# Allegro board MT-2T4R-01_REV-A_20260407.brd
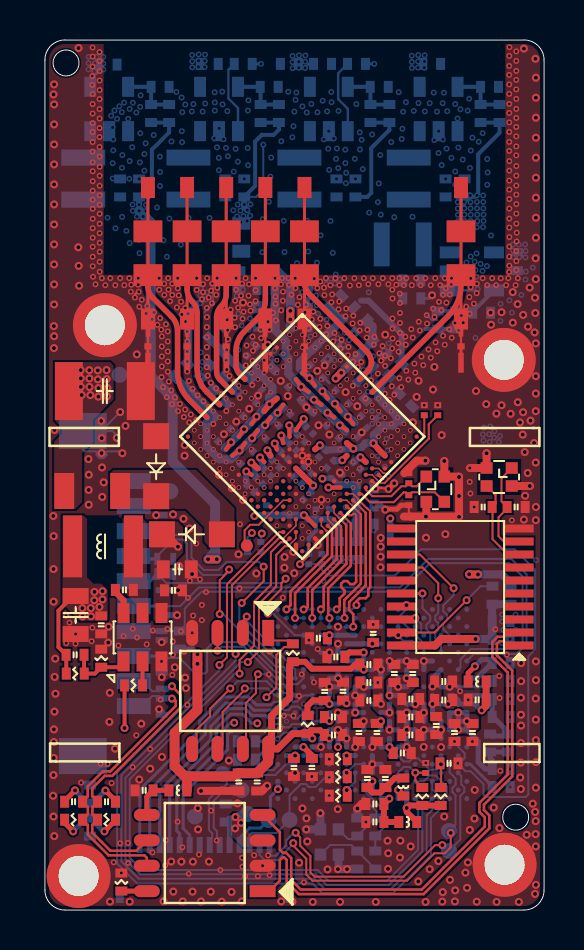
[diagram p0: board, top side]
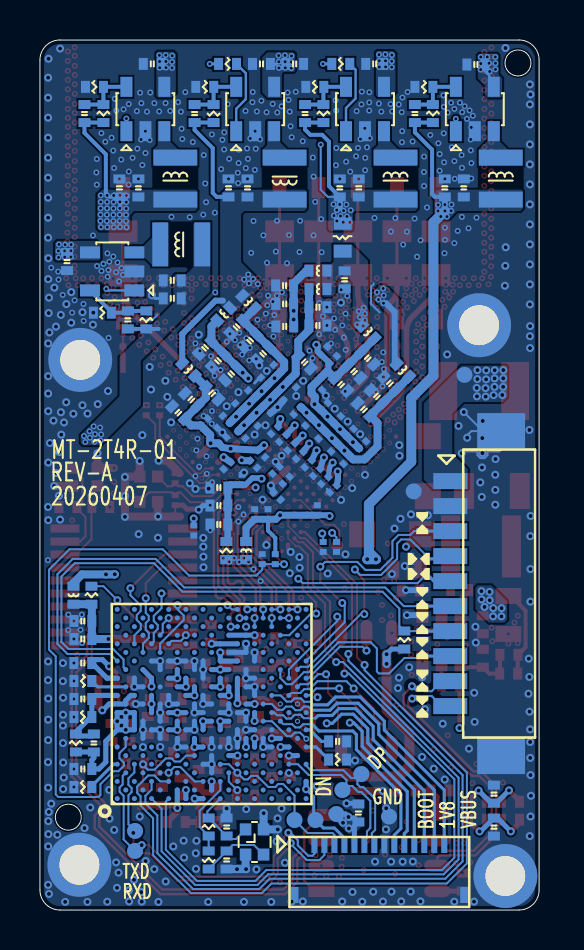
[diagram p1: board, bottom side, seen from below]

Outline 25 x 43.5 mm; copper layers: TOP, 02-GND1, 03-POWER, BOTTOM. Coordinates in mm from the lower left corner of the outline.
Outline path: circle c1.06,42.35 r0.65 ; circle c23.58,4.64 r0.65 ; 0,42.5 0,1 arc(0.29,0.29) 1,0 24,0 arc(24.71,0.29) 25,1 25,42.5 arc(24.71,43.21) 24,43.5 1,43.5 arc(0.29,43.21) 0,42.5

## Design rules (mm)
net group DP6: nets N2464554 N2465035
net group DP7: nets RXCAN TXCAN
net group DP8: nets CANH CANL
net group DP9: nets USB_DN USB_DP

## Placement (name value [footprint] x y rotation side)
C1  100pF  [0201]  13.12 27.08 225 bottom
C2  100pF  [0201]  14.39 25.81 225 bottom
C3  100pF  [0201]  13.76 26.45 225 bottom
C4  100pF  [0201]  15.05 25.16 225 bottom
C5  100pF  [0201]  15.67 24.54 225 bottom
C6  100pF  [0201]  12.34 26.3 45 bottom
C7  100pF  [0201]  12.98 25.67 45 bottom
C8  100pF  [0201]  13.62 25.03 45 bottom
C9  100pF  [0201]  14.27 24.38 45 bottom
C10  100pF  [0201]  14.89 23.76 45 bottom
C11  100pF  [0201]  11.53 24.4 135 bottom
C12  100pF  [0201]  12.12 24.96 135 bottom
C13  100pF  [0201]  9.62 22.49 135 bottom
C14  100pF  [0201]  10.88 23.74 135 bottom
C15  100pF  [0201]  10.24 23.1 135 bottom
C16  100pF  [0201]  11.04 25.83 315 bottom
C17  100pF  [0201]  10.75 25.19 315 bottom
C18  100pF  [0201]  10.1 24.52 315 bottom
C19  100pF  [0201]  9.46 23.88 315 bottom
C20  100pF  [0201]  8.84 23.26 315 bottom
C21  100pF  [0201]  10.31 27.52 315 bottom
C22  100pF  [0201]  10.79 27.99 315 bottom
C23  100pF  [0201]  11.14 21.89 135 bottom
C24  100pF  [0201]  11.99 22.73 135 bottom
C25  100pF  [0201]  12.84 23.58 135 bottom
C26  100pF  [0201]  10.31 21.05 135 bottom
C27  100pF  [0201]  17.3 18.98 90 bottom
C28  100pF  [0201]  15.62 22.21 135 bottom
C29  100pF  [0201]  11.57 22.31 135 bottom
C30  100pF  [0201]  12.41 23.16 135 bottom
C31  100pF  [0201]  14.3 22.29 45 bottom
C32  100pF  [0201]  13.24 23.99 135 bottom
C33  100pF  [0201]  10.73 21.48 135 bottom
C35  100pF  [0201]  15.84 23.47 315 bottom
C36  100pF  [0201]  13.9 22.81 45 bottom
C37  100pF  [0201]  16.77 24.4 315 bottom
C38  100pF  [0201]  16.3 23.93 315 bottom
C39  100pF  [0201]  14.87 21.51 270 bottom
C40  100pF  [0201]  13.17 21.99 315 bottom
C41  100pF  [0201]  12.67 21.49 315 bottom
C42  100pF  [0201]  13.12 20.69 45 bottom
C44  100pF  [0201]  14.24 19.79 270 bottom
C45  100pF  [0201]  11.11 19.99 270 bottom
C46  100pF  [0201]  13.58 19.79 270 bottom
C48  8pF  [0201]  18.23 21.59 270 top
C49  16pF  [0201]  18.23 20.49 90 top
C50  100pF  [0201]  19.67 24.99 270 top
C51  100nF  [0201]  13.87 17.54 270 bottom
C52  15pF  [C0402]  15.65 4.15 90 bottom
C53  15pF  [C0402]  15.65 2.5 270 bottom
C57  1uF  [C0402]  9.71 6.4 270 top
C66  10uF  [C0402]  11.08 30.14 0 bottom
C67  10nF  [C0402]  11.08 29.23 0 bottom
C68  100pF  [C0402]  11.75 27.39 45 bottom
C70  0.1uF  [C0402]  10.09 8.43 0 bottom
C72  10uF  [C0402]  8.58 27.59 45 bottom
C73  10nF  [C0402]  9.27 26.92 45 bottom
C74  100pF  [C0402]  9.92 26.27 45 bottom
C75  10uF  [C0402]  16.04 19.27 180 bottom
C76  10nF  [C0402]  16.04 20.22 180 bottom
C77  100pF  [C0402]  16.04 21.12 180 bottom
C81  10uF  [C0402]  12.74 29.18 180 bottom
C82  10nF  [C0402]  12.74 30.31 180 bottom
C83  100pF  [C0402]  12.75 31.22 180 bottom
C84  10uF  [C0402]  12.24 42.31 0 bottom
C85  0.1uF  [C0402]  13.9 42.31 180 bottom
C86  10pF  [C0402]  17.25 39.82 270 bottom
C87  10uF  [C0402]  14.6 36.11 90 bottom
C88  0.1uF  [C0402]  15.55 36.11 90 bottom
C90  10uF  [C0402]  15.15 29.15 135 bottom
C91  10nF  [C0402]  14.47 28.46 135 bottom
C92  100pF  [C0402]  13.82 27.81 135 bottom
C93  0.1uF  [C0402]  18.37 30.58 180 bottom
C94  10uF  [C0402]  18.37 31.48 180 bottom
C95  10uF  [C0402]  7.47 26.33 225 bottom
C96  10nF  [C0402]  8.12 25.68 225 bottom
C97  100pF  [C0402]  8.77 25.03 225 bottom
C98  10uF  [C0402]  16.37 25.83 45 bottom
C99  10nF  [C0402]  17.42 25.52 225 bottom
C100  100pF  [C0402]  18.07 24.87 225 bottom
C104  10uF  [C0402]  16.73 28.11 135 bottom
C105  10nF  [C0402]  16.08 27.46 135 bottom
C106  100pF  [C0402]  15.42 26.8 135 bottom
C116  0.1uF  [C0402]  9.74 31.51 270 bottom
C128  0.1uF  [C0402]  22.85 13.55 180 bottom
C129  10uF  [C0402]  22.85 14.45 180 bottom
C130  18pF  [C0402]  21.95 20.15 0 top
C131  18pF  [C0402]  23.6 20.15 180 top
C132  4.7nF  [C0402]  2.26 4.14 270 bottom
C133  47pF  [C0402]  1.44 5.41 0 top
C134  47pF  [C0402]  3.09 5.41 0 top
C135  47pF  [C0402]  2.26 5.79 90 bottom
C136  0.1uF  [C0402]  9.05 4.85 270 bottom
C137  0.1uF  [C0402]  4.97 5.98 0 top
C138  0.1uF  [C0402]  9.03 36.11 270 bottom
C139  0.1uF  [C0402]  4.72 36.11 270 bottom
C140  10pF  [C0402]  11.72 39.82 270 bottom
C141  10pF  [C0402]  6.22 39.82 270 bottom
C142  10uF  [C0402]  3.17 42.27 0 bottom
C143  10uF  [C0402]  3.77 36.11 270 bottom
C145  10uF  [C0402]  8.23 42.31 180 bottom
C146  10uF  [C0402]  9.98 36.11 270 bottom
C147  10uF  [C0402]  20.07 36.11 270 bottom
C148  10uF  [C0402]  19.37 42.31 0 bottom
C149  0.1uF  [C0402]  21.02 36.11 270 bottom
C150  10uF  [C0402]  23.65 32.42 270 bottom
C151  10pF  [C0402]  20.6 29.5 270 bottom
C153  10pF  [C0402]  22.77 39.82 270 bottom
C193  0.1uF  [C0402]  16.23 12.28 0 top
C194  1uF  [C0402]  21.65 10.51 180 top
C198  1uF  [C0402]  14.01 10.93 90 top
C200  0.1uF  [C0402]  22.85 12.35 0 bottom
C205  0.1uF  [C0402]  16.52 5.3 0 top
C206  10uF  [C0402]  16.23 10.47 0 top
C208  0.1uF  [C0402]  14.93 10.94 90 top
C209  10nF  [C0402]  16.23 11.38 0 top
C210  1uF  [C0402]  14.45 9.65 0 top
C214  10uF  [C0402]  19.6 9.22 270 top
C215  0.1uF  [C0402]  21.41 8.87 270 top
C216  10uF  [C0402]  18.32 10.55 0 top
C217  0.1uF  [C0402]  17.5 11.82 90 top
C220  0.1uF  [C0402]  16.15 6.58 270 top
C221  10nF  [C0402]  18.43 11.82 90 top
C223  1uF  [C0402]  22.85 7.05 0 bottom
C224  0.1uF  [C0402]  22.85 10.55 0 bottom
C225  0.1uF  [C0402]  22.3 8.35 90 bottom
C227  10nF  [C0402]  20.51 8.87 270 top
C229  0.1uF  [C0402]  17.9 7.85 0 top
C232  0.1uF  [C0402]  14.57 12.65 180 top
C234  0.1uF  [C0402]  13.37 7.12 270 top
C237  0.1uF  [C0402]  14.45 8.75 0 top
C244  0.1uF  [C0402]  12.47 7.12 270 top
C247  0.1uF  [C0402]  13.7 13.59 180 top
C249  0.1uF  [C0402]  16.44 13.83 270 top
C252  1uF  [C0402]  20.24 7.33 180 top
C253  100nF  [0201]  19.07 7.1 270 top
C254  0.1uF  [C0402]  10.63 6.4 270 top
C256  100pF  [C0402]  1.51 12.76 0 top
C257  22uF/10V  [C0805]  1.54 14.75 270 top
C258  10uF  [C0402]  2.82 14.26 270 top
C260  10uF/25V  [C0603]  6.63 17.03 0 top
C261  0.1uF  [C0402]  6.44 15.98 180 top
C263  0.1uF  [C0402]  3.98 16 180 top
C264  10uF  [C0402]  16.52 4.4 180 top
C265  10uF  [C0402]  17.05 6.58 90 top
C266  0.1uF  [C0402]  19.98 11.43 0 top
C267  10nF  [C0402]  19.98 10.5 0 top
C268  0.1uF  [C0402]  18.32 8.75 0 top
C269  10nF  [C0402]  18.32 9.65 0 top
C270  0.1uF  [C0402]  16.62 8.88 270 top
C271  10nF  [C0402]  15.72 8.88 270 top
C272  22uF/35V  [C1210]  3 25.95 180 top
D2  ESD  [SOD123_FL]  5.57 22.19 90 top
D3  S14  [SOD123_FL]  7.36 18.78 0 top
ESD15  -  [ESD0402]  5.85 10.17 270 bottom
ESD16  -  [ESD0402]  5.85 11.47 90 bottom
ESD17  -  [ESD0402]  5.85 13.09 90 bottom
ESD18  -  [ESD0402]  5.85 14.34 90 bottom
ESD19  -  [ESD0402]  5.85 15.59 90 bottom
ESD20  -  [ESD0402]  6.03 16.8 0 bottom
ESD21  -  [ESD0402]  6.03 17.56 0 bottom
ESD22  -  [ESD0402]  5.85 19.34 90 bottom
F1  SRF1206P100-24  [F1206]  2.37 20.95 0 top
FB1  BLM03AX100SZ1B  [L0402]  11.07 31.05 0 bottom
FB3  BLM03AX100SZ1B  [L0402]  8.55 28.9 225 bottom
FB5  BLM03AX100SZ1B  [L0402]  11.08 31.97 0 bottom
FB6  BLM03AX100SZ1B  [L0402]  14.67 17.97 90 bottom
FB7  BLM03AX100SZ1B  [L0402]  14.55 30.4 225 bottom
FB8  BLM03AX100SZ1B  [L0402]  6.82 26.98 225 bottom
FB9  BLM03AX100SZ1B  [L0402]  17.55 27.02 225 bottom
FB11  BLM03AX100SZ1B  [L0402]  15.8 29.8 315 bottom
FB12  BLM03AX100SZ1B  [L0402]  23.32 15.74 270 bottom
FB13  BLM03AX100SZ1B  [L0402]  6.66 5.98 180 top
FB16  BLM03AX100SZ1B  [L0402]  21.65 11.43 180 top
FB17  BLM03AX100SZ1B  [L0402]  18.18 4.4 0 top
FB18  BLM03AX100SZ1B  [L0402]  17.95 6.15 270 top
H1  M2  [MH3D2-2D0]  3 29.24 0 top
H2  M2  [MH3D2-2D0]  23.02 2.26 0 top
H3  M2  [MH3D2-2D0]  22.98 27.51 0 top
H4  M2  [MH3D2-2D0]  1.69 1.7 0 top
J2  MX1D25-10  [1D25T-10PLT]  4.45 15.82 270 bottom
J3  FPC-14_0D5  [HC-FPC-05-09-14RLTAG]  8 3.25 180 bottom
L2  FHD4020S-2R2MT  [L4020]  2.91 18.18 180 top
L5  FTC252012S2R2MBCA  [L2520]  12.74 36.57 270 bottom
L11  FTC252012S2R2MBCA  [L2520]  1.92 36.57 90 bottom
L12  FTC252012S2R2MBCA  [L2520]  7.19 36.57 90 bottom
L13  FTC252012S2R2MBCA  [L2520]  18.22 36.57 90 bottom
L14  FTC252012S2R2MBCA  [L2520]  17.92 33.28 0 bottom
R4  240/1%  [R0402]  22.85 11.45 0 bottom
R11  220K 1%  [R0402]  1.52 11.82 0 top
R12  30K 1%  [R0402]  2.82 12.59 90 top
R18  1M  [R0402]  16.55 4.15 270 bottom
R28  24K 1%  [0201]  19 24.99 270 top
R31  10K  [0201]  13.21 17.54 270 bottom
R40  133 1%  [R0402]  10.09 7.52 180 bottom
R48  5.1R  [R0402]  15.67 17.97 90 bottom
R50  100K  [R0402]  15.6 42.31 0 bottom
R51  47K 1%  [R0402]  16.3 39.82 90 bottom
R53  100K/1%  [R0402]  5.32 39.82 270 bottom
R54  33K 1%  [R0402]  16.74 41.16 0 bottom
R56  20K  [0201]  10.15 18.15 90 bottom
R57  20K  [0201]  10.81 18.15 90 bottom
R61  30K/1%  [R0402]  21.82 39.82 270 bottom
R63  49.9K/1%  [R0402]  22.27 41.16 180 bottom
R64  68K/1%  [R0402]  19.67 29.5 270 bottom
R67  68K/1%  [R0402]  21.87 29.87 180 bottom
R70  10K  [R0402]  22.42 15.74 270 bottom
R71  62R  [R0402]  1.44 4.51 0 top
R72  62R  [R0402]  3.09 4.51 0 top
R73  10K  [R0402]  3.83 1.4 90 top
R74  33K/1%  [R0402]  11.23 41.16 180 bottom
R75  68K/1%  [R0402]  10.8 39.82 270 bottom
R76  100K  [R0402]  9.93 42.31 180 bottom
R77  22K/1%  [R0402]  5.77 41.16 0 bottom
R83  0R  [R0603]  9.84 33.64 270 bottom
R86  10K/1%  [R0402]  22.85 9.65 180 bottom
R87  10K/1%  [R0402]  23.2 8.35 270 bottom
R89  1K  [R0402]  22.85 6.15 180 bottom
R90  1.8K  [R0402]  16.55 2.5 90 bottom
R93  100K  [R0402]  19.82 5.67 270 top
R94  100K  [R0402]  18.9 5.67 270 top
R97  100K  [R0402]  6.75 13.5 270 bottom
R98  10K  [R0402]  14.69 7.54 0 top
R99  10K  [R0402]  14.69 6.64 0 top
R100  10K  [R0402]  14.69 5.71 0 top
R101  0  [R0402]  13.16 9.27 270 top
R102  100K  [R0402]  4.44 11.23 0 top
R103  10K  [R0402]  12.42 12.86 90 top
RX1  ANTENNA  [MOTO_1X4_RF]  11.04 31.76 0 top
RX2  ANTENNA  [MOTO_1X4_RF]  9.08 31.76 0 top
RX3  ANTENNA  [MOTO_1X4_RF]  7.12 31.76 0 top
RX4  ANTENNA  [MOTO_1X4_RF]  5.16 31.76 0 top
TP14  NC  [TP_80]  3.74 26.76 270 bottom
TP28  T  [TP_60]  10.12 18.22 45 top
TP31  NC  [TP_80]  6.28 20.93 0 bottom
TP36  NC  [TP_80]  12.25 4.5 180 bottom
TP37  NC  [TP_80]  20.24 2.95 180 bottom
TP38  NC  [TP_80]  20.24 3.95 180 bottom
TP39  NC  [TP_80]  10.15 4.8 180 bottom
TP40  NC  [TP_80]  9.85 6 225 bottom
TP41  NC  [TP_80]  8.9 6.8 135 bottom
TP42  NC  [TP_80]  7.51 4.67 180 bottom
TP43  NC  [TP_80]  11.2 4.5 180 bottom
TX2  ANTENNA  [MOTO_1X4_RF]  13 31.76 0 top
TX3  ANTENNA  [MOTO_1X4_RF]  20.84 31.76 0 top
U1  Cheetah_4T4R  [CHEETAH_WLCSP265]  12.89 23.67 315 top
U4  SY8105IADC  [SOT23-6]  4.89 13.63 90 top
U8  YX55015F  [SOT23-5L]  3.22 40.04 90 bottom
U10  YX55015F  [SOT23-5L]  14.22 40.04 90 bottom
U11  YX55015F  [SOT23-5L]  21.37 31.93 0 bottom
U12  SIT1042AT/3  [SOP-8]  8 2.85 90 top
U14  MCP2515  [TSSOP20]  20.8 16.15 180 top
U15  YX55015F  [SOT23-5L]  8.72 40.04 90 bottom
U16  YX55015F  [SOT23-5L]  19.72 40.04 90 bottom
U19  XT25F16FSOIGU-S  [SOP-8]  9.28 10.95 180 top
U21  X2100L  [X2100_BGA264_0D43_10X10]  16.4 10.3 90 bottom
Y1  40MHz  [CRY4_2016]  19.55 21.04 270 top
Y2  16M  [CRY4_2016]  22.75 21.65 180 top
Y4  24M_20PPM  [CRY4_2016]  14.25 3.4 270 bottom

## Library data of the parts
C1-C33 C35-C42 C44-C46 C48-C51 C66-C68 C72-C77 C81-C86 C90-C92 C95-C100 C104-C106 C210 C223 C256 C257 = CAP NP
C52 C53 = CAP_NP_MINI
C57 C70 C87 C88 C116 C193 C194 C198 C200 C205 C206 C208 C209 C214-C217 C220 C221 C224 C225 C227 C229 C232 C234 C237 C244 C247 C249 C254 C258 C260 C264-C271 = CAP_NP
C93 C94 C128 C129 C133 C134 C136-C140 C142 C143 C145-C150 C261 C263 C272 = CAP_NP_3
C130-C132 C135 = CAP_NP_2
C141 C151 C153 C252 C253 = CAP NP_2
D2 = Diode H Zener_0
D3 = DIODE PIN_5
ESD15-ESD22 = 1_0.5KE100A
F1 = FUSE
FB1 FB3 FB5-FB9 FB11-FB13 FB16-FB18 = FB
H1-H4 = HOLE-V8_3
J2 = CON12_0
J3 = CON16_0
L2 L11-L14 = INDUCTOR
L5 = Inductor 1206 H_0
R4 R40 = R_10
R11 R12 = R_0
R18 R103 = R_MINI_7
R28 R48 R50 R56 R57 = RES_0
R31 R51 R54 R83 = R
R53 R61 R63 R64 R67 R70-R77 R86 R87 R93 R94 R97 R101 R102 = R_MINI
R89 = R_1
R90 R98-R100 = R_52
RX1-RX4 TX2 TX3 = ANTENNA_2
TP14 TP31 TP36-TP43 = TEST_0
TP28 = TEST_2
U1 = Cheetah_4T4R
U4 = SOT-26_2
U8 U10 U11 U15 U16 = DCDC_RT8096C_6
U12 = IC-8_1
U14 = SIT2515_1
U19 = XM25QH128A_0
U21 = X2100L
Y1 Y2 Y4 = CRYSTAL_4

## Footprints (pads in the part's own frame, mm; a bottom-side part is the same pattern mirrored in y, then rotated)
1D25T-10PLT
  rect 0.8x1.7 smd: 1(-5.625,0) 2(-4.375,0) 3(-3.125,0) 4(-1.875,0) 5(-0.625,0) 6(0.625,0) 7(1.875,0) 8(3.125,0) 9(4.375,0) 10(5.625,0)
  rect 1.8x2.4 smd: 11(-8.125,2.55) 12(8.125,2.55)
0201
  rect 0.3x0.35 smd: 1(-0.25,0) 2(0.25,0)
C0402
  rect 0.45x0.599 smd: 1(-0.45,0) 2(0.45,0)
C0603
  rect 0.65x0.899 smd: 1(-0.7,0) 2(0.7,0)
C0805
  rect 0.8x1.3 smd: 1(-0.95,0) 2(0.95,0)
C1210
  rect 1.4x2.9 smd: 1(-1.8,0) 2(1.8,0)
CHEETAH_WLCSP265
  round 0.221 smd: A1(-4.05,4.05) A2(-3.6,4.05) A3(-3.15,4.05) A4(-2.7,4.05) A5(-2.25,4.05) A6(-1.8,4.05) A7(-1.35,4.05) A8(-0.9,4.05) A9(-0.45,4.05) A10(0,4.05) A11(0.45,4.05) A12(0.9,4.05) A13(1.35,4.05) A14(1.8,4.05) A15(2.25,4.05) A16(2.7,4.05) A17(3.15,4.05) A18(3.6,4.05) A19(4.05,4.05) B1(-4.05,3.6) B2(-3.6,3.6) B3(-3.15,3.6) B4(-2.7,3.6) B5(-2.25,3.6) B7(-1.35,3.6) B9(-0.45,3.6) B11(0.45,3.6) B13(1.35,3.6) B14(1.8,3.6) B15(2.25,3.6) B16(2.7,3.6) B17(3.15,3.6) B18(3.6,3.6) B19(4.05,3.6) C1(-4.05,3.15) C2(-3.6,3.15) C3(-3.15,3.15) C5(-2.25,3.15) C7(-1.35,3.15) C9(-0.45,3.15) C11(0.45,3.15) C13(1.35,3.15) C14(1.8,3.15) C15(2.25,3.15) C16(2.7,3.15) C17(3.15,3.15) C18(3.6,3.15) C19(4.05,3.15) D1(-4.05,2.7) D2(-3.6,2.7) D3(-3.15,2.7) D5(-2.25,2.7) D7(-1.35,2.7) D9(-0.45,2.7) D11(0.45,2.7) D13(1.35,2.7) D16(2.7,2.7) D17(3.15,2.7) D18(3.6,2.7) D19(4.05,2.7) E1(-4.05,2.25) E2(-3.6,2.25) E3(-3.15,2.25) E5(-2.25,2.25) E7(-1.35,2.25) E9(-0.45,2.25) E11(0.45,2.25) E13(1.35,2.25) E17(3.15,2.25) E18(3.6,2.25) E19(4.05,2.25) F1(-4.05,1.8) F2(-3.6,1.8) F3(-3.15,1.8) F5(-2.25,1.8) F7(-1.35,1.8) F9(-0.45,1.8) F11(0.45,1.8) F13(1.35,1.8) F14(1.8,1.8) F17(3.15,1.8) F18(3.6,1.8) F19(4.05,1.8) G1(-4.05,1.35) G2(-3.6,1.35) G3(-3.15,1.35) G5(-2.25,1.35) G7(-1.35,1.35) G9(-0.45,1.35) G11(0.45,1.35) G13(1.35,1.35) G14(1.8,1.35) G17(3.15,1.35) G18(3.6,1.35) G19(4.05,1.35) H1(-4.05,0.9) H2(-3.6,0.9) H3(-3.15,0.9) H13(1.35,0.9) H14(1.8,0.9) H15(2.25,0.9) H16(2.7,0.9) H17(3.15,0.9) H18(3.6,0.9) H19(4.05,0.9) J1(-4.05,0.45) J2(-3.6,0.45) J3(-3.15,0.45) J4(-2.7,0.45) J5(-2.25,0.45) J6(-1.8,0.45) J7(-1.35,0.45) J16(2.7,0.45) J17(3.15,0.45) J18(3.6,0.45) J19(4.05,0.45) K1(-4.05,0) K9(-0.45,0) K10(0,0) K11(0.45,0) K12(0.9,0) K16(2.7,0) K17(3.15,0) K18(3.6,0) K19(4.05,0) L1(-4.05,-0.45) L2(-3.6,-0.45) L3(-3.15,-0.45) L4(-2.7,-0.45) L5(-2.25,-0.45) L6(-1.8,-0.45) L7(-1.35,-0.45) L9(-0.45,-0.45) L10(0,-0.45) L11(0.45,-0.45) L12(0.9,-0.45) L13(1.35,-0.45) L14(1.8,-0.45) L16(2.7,-0.45) L17(3.15,-0.45) L18(3.6,-0.45) L19(4.05,-0.45) M1(-4.05,-0.9) M9(-0.45,-0.9) M10(0,-0.9) M11(0.45,-0.9) M12(0.9,-0.9) M13(1.35,-0.9) M14(1.8,-0.9) M17(3.15,-0.9) M18(3.6,-0.9) M19(4.05,-0.9) N1(-4.05,-1.35) N2(-3.6,-1.35) N3(-3.15,-1.35) N4(-2.7,-1.35) N5(-2.25,-1.35) N6(-1.8,-1.35) N7(-1.35,-1.35) N9(-0.45,-1.35) N10(0,-1.35) N11(0.45,-1.35) N12(0.9,-1.35) N13(1.35,-1.35) N14(1.8,-1.35) N17(3.15,-1.35) N18(3.6,-1.35) N19(4.05,-1.35) P1(-4.05,-1.8) P9(-0.45,-1.8) P10(0,-1.8) P11(0.45,-1.8) P12(0.9,-1.8) P13(1.35,-1.8) P14(1.8,-1.8) P15(2.25,-1.8) P16(2.7,-1.8) P17(3.15,-1.8) P18(3.6,-1.8) P19(4.05,-1.8) R1(-4.05,-2.25) R2(-3.6,-2.25) R3(-3.15,-2.25) R4(-2.7,-2.25) R5(-2.25,-2.25) R6(-1.8,-2.25) R7(-1.35,-2.25) R9(-0.45,-2.25) R10(0,-2.25) R11(0.45,-2.25) R12(0.9,-2.25) R13(1.35,-2.25) R14(1.8,-2.25) R15(2.25,-2.25) R16(2.7,-2.25) R17(3.15,-2.25) R18(3.6,-2.25) R19(4.05,-2.25) T1(-4.05,-2.7) T9(-0.45,-2.7) T10(0,-2.7) T11(0.45,-2.7) T12(0.9,-2.7) T13(1.35,-2.7) T14(1.8,-2.7) T15(2.25,-2.7) T17(3.15,-2.7) T18(3.6,-2.7) T19(4.05,-2.7) U1(-4.05,-3.15) U2(-3.6,-3.15) U3(-3.15,-3.15) U4(-2.7,-3.15) U5(-2.25,-3.15) U6(-1.8,-3.15) U7(-1.35,-3.15) U9(-0.45,-3.15) U10(0,-3.15) U11(0.45,-3.15) U12(0.9,-3.15) U13(1.35,-3.15) U14(1.8,-3.15) U15(2.25,-3.15) U16(2.7,-3.15) U17(3.15,-3.15) U18(3.6,-3.15) U19(4.05,-3.15) V1(-4.05,-3.6) V2(-3.6,-3.6) V3(-3.15,-3.6) V4(-2.7,-3.6) V5(-2.25,-3.6) V6(-1.8,-3.6) V7(-1.35,-3.6) V8(-0.9,-3.6) V9(-0.45,-3.6) V10(0,-3.6) V11(0.45,-3.6) V12(0.9,-3.6) V13(1.35,-3.6) V14(1.8,-3.6) V15(2.25,-3.6) V16(2.7,-3.6) V17(3.15,-3.6) V18(3.6,-3.6) V19(4.05,-3.6) W1(-4.05,-4.05) W2(-3.6,-4.05) W3(-3.15,-4.05) W4(-2.7,-4.05) W5(-2.25,-4.05) W6(-1.8,-4.05) W7(-1.35,-4.05) W8(-0.9,-4.05) W9(-0.45,-4.05) W10(0,-4.05) W11(0.45,-4.05) W12(0.9,-4.05) W13(1.35,-4.05) W14(1.8,-4.05) W15(2.25,-4.05) W16(2.7,-4.05) W17(3.15,-4.05) W18(3.6,-4.05) W19(4.05,-4.05)
CRY4_2016
  rect 0.6x0.58 smd: 1(-0.63,-0.45) 2(0.63,-0.45) 3(0.63,0.45) 4(-0.63,0.45)
ESD0402
  rect 0.3x0.599 smd: 1(-0.399,0) 2(0.399,0)
F1206
  rect 1x1.8 smd: 1(-1.4,0) 2(1.4,0)
HC-FPC-05-09-14RLTAG
  rect 0.3x0.8 smd: 1(-3.25,0) 2(-2.75,0) 3(-2.25,0) 4(-1.75,0) 5(-1.25,0) 6(-0.75,0) 7(-0.25,0) 8(0.25,0) 9(0.75,0) 10(1.25,0) 11(1.75,0) 12(2.25,0) 13(2.75,0) 14(3.25,0)
  rect 0.4x0.8 smd: 15(-4.25,-2.5) 16(4.25,-2.5)
L0402
  rect 0.45x0.599 smd: 1(-0.45,0) 2(0.45,0)
L2520
  rect 0.8x2.2 smd: 1(-1.05,0) 2(1.05,0)
L4020
  rect 0.95x3.1 smd: 1(-1.525,0) 2(1.525,0)
MH3D2-2D0
  round 3.2 hole 2: 1(0,0)
MOTO_1X4_RF
  custom 1.442x9.787 smd: 1(0,0)
R0402
  rect 0.45x0.599 smd: 1(-0.45,0) 2(0.45,0)
R0603
  rect 0.65x0.899 smd: 1(-0.7,0) 2(0.7,0)
SOD123_FL
  rect 1.3x1.3 smd: 1(-1.5,0) 2(1.5,0)
SOP-8
  rect 0.6x1.3 smd: 1(-1.905,-2.9)
  oval 0.6x1.3 smd: 2(-0.635,-2.9) 3(0.635,-2.9) 4(1.905,-2.9) 5(1.905,2.9) 6(0.635,2.9) 7(-0.635,2.9) 8(-1.905,2.9)
SOT23-5L
  rect 1x0.6 smd: 1(-1.1,0.95) 2(-1.1,0) 3(-1.1,-0.95) 4(1.12,-0.95) 5(1.12,0.95)
SOT23-6
  rect 1x0.6 smd: 1(-1.2,0.95) 2(-1.2,0) 3(-1.2,-0.95) 4(1.22,-0.95) 5(1.22,0) 6(1.22,0.95)
TP_60
  round 0.6 smd: 1(0,0)
TP_80
  round 0.8 smd: 1(0,0)
TSSOP20
  rect 1.45x0.4 smd: 1(-2.95,2.925) 2(-2.95,2.275) 3(-2.95,1.625) 4(-2.95,0.975) 5(-2.95,0.325) 6(-2.95,-0.325) 7(-2.95,-0.975) 8(-2.95,-1.625) 9(-2.95,-2.275) 10(-2.95,-2.925) 11(2.95,-2.925) 12(2.95,-2.275) 13(2.95,-1.625) 14(2.95,-0.975) 15(2.95,-0.325) 16(2.95,0.325) 17(2.95,0.975) 18(2.95,1.625) 19(2.95,2.275) 20(2.95,2.925)
X2100_BGA264_0D43_10X10
  round 0.25 smd: A1(-4.73,4.73) A3(-3.87,4.73) A5(-3.01,4.73) A7(-2.15,4.73) A9(-1.29,4.73) A11(-0.43,4.73) A13(0.43,4.73) A15(1.29,4.73) A17(2.15,4.73) A19(3.01,4.73) A21(3.87,4.73) A23(4.73,4.73) AA1(-4.73,-3.87) AA3(-3.87,-3.87) AA5(-3.01,-3.87) AA7(-2.15,-3.87) AA9(-1.29,-3.87) AA11(-0.43,-3.87) AA13(0.43,-3.87) AA15(1.29,-3.87) AA17(2.15,-3.87) AA19(3.01,-3.87) AA21(3.87,-3.87) AA23(4.73,-3.87) AB2(-4.3,-4.3) AB4(-3.44,-4.3) AB6(-2.58,-4.3) AB8(-1.72,-4.3) AB10(-0.86,-4.3) AB12(0,-4.3) AB14(0.86,-4.3) AB16(1.72,-4.3) AB18(2.58,-4.3) AB20(3.44,-4.3) AB22(4.3,-4.3) AC1(-4.73,-4.73) AC3(-3.87,-4.73) AC5(-3.01,-4.73) AC7(-2.15,-4.73) AC9(-1.29,-4.73) AC11(-0.43,-4.73) AC13(0.43,-4.73) AC15(1.29,-4.73) AC17(2.15,-4.73) AC19(3.01,-4.73) AC21(3.87,-4.73) AC23(4.73,-4.73) B2(-4.3,4.3) B4(-3.44,4.3) B6(-2.58,4.3) B8(-1.72,4.3) B10(-0.86,4.3) B12(0,4.3) B14(0.86,4.3) B16(1.72,4.3) B18(2.58,4.3) B20(3.44,4.3) B22(4.3,4.3) C1(-4.73,3.87) C3(-3.87,3.87) C5(-3.01,3.87) C7(-2.15,3.87) C9(-1.29,3.87) C11(-0.43,3.87) C13(0.43,3.87) C15(1.29,3.87) C17(2.15,3.87) C19(3.01,3.87) C21(3.87,3.87) C23(4.73,3.87) D2(-4.3,3.44) D4(-3.44,3.44) D6(-2.58,3.44) D8(-1.72,3.44) D10(-0.86,3.44) D12(0,3.44) D14(0.86,3.44) D16(1.72,3.44) D18(2.58,3.44) D20(3.44,3.44) D22(4.3,3.44) E1(-4.73,3.01) E3(-3.87,3.01) E5(-3.01,3.01) E7(-2.15,3.01) E9(-1.29,3.01) E11(-0.43,3.01) E13(0.43,3.01) E15(1.29,3.01) E17(2.15,3.01) E19(3.01,3.01) E21(3.87,3.01) E23(4.73,3.01) F2(-4.3,2.58) F4(-3.44,2.58) F6(-2.58,2.58) F8(-1.72,2.58) F10(-0.86,2.58) F12(0,2.58) F14(0.86,2.58) F16(1.72,2.58) F18(2.58,2.58) F20(3.44,2.58) F22(4.3,2.58) G1(-4.73,2.15) G3(-3.87,2.15) G5(-3.01,2.15) G9(-1.29,2.15) G11(-0.43,2.15) G13(0.43,2.15) G15(1.29,2.15) G17(2.15,2.15) G19(3.01,2.15) G21(3.87,2.15) G23(4.73,2.15) H2(-4.3,1.72) H4(-3.44,1.72) H6(-2.58,1.72) H8(-1.72,1.72) H10(-0.86,1.72) H12(0,1.72) H14(0.86,1.72) H16(1.72,1.72) H18(2.58,1.72) H20(3.44,1.72) H22(4.3,1.72) J1(-4.73,1.29) J3(-3.87,1.29) J5(-3.01,1.29) J7(-2.15,1.29) J9(-1.29,1.29) J11(-0.43,1.29) J13(0.43,1.29) J15(1.29,1.29) J17(2.15,1.29) J19(3.01,1.29) J21(3.87,1.29) J23(4.73,1.29) K2(-4.3,0.86) K4(-3.44,0.86) K6(-2.58,0.86) K8(-1.72,0.86) K10(-0.86,0.86) K12(0,0.86) K14(0.86,0.86) K16(1.72,0.86) K18(2.58,0.86) K20(3.44,0.86) K22(4.3,0.86) L1(-4.73,0.43) L3(-3.87,0.43) L5(-3.01,0.43) L7(-2.15,0.43) L9(-1.29,0.43) L11(-0.43,0.43) L13(0.43,0.43) L15(1.29,0.43) L17(2.15,0.43) L19(3.01,0.43) L21(3.87,0.43) L23(4.73,0.43) M2(-4.3,0) M4(-3.44,0) M6(-2.58,0) M8(-1.72,0) M10(-0.86,0) M12(0,0) M14(0.86,0) M16(1.72,0) M18(2.58,0) M20(3.44,0) M22(4.3,0) N1(-4.73,-0.43) N3(-3.87,-0.43) N5(-3.01,-0.43) N7(-2.15,-0.43) N9(-1.29,-0.43) N11(-0.43,-0.43) N13(0.43,-0.43) N15(1.29,-0.43) N17(2.15,-0.43) N19(3.01,-0.43) N21(3.87,-0.43) N23(4.73,-0.43) P2(-4.3,-0.86) P4(-3.44,-0.86) P6(-2.58,-0.86) P8(-1.72,-0.86) P10(-0.86,-0.86) P12(0,-0.86) P14(0.86,-0.86) P16(1.72,-0.86) P18(2.58,-0.86) P20(3.44,-0.86) P22(4.3,-0.86) R1(-4.73,-1.29) R3(-3.87,-1.29) R5(-3.01,-1.29) R7(-2.15,-1.29) R9(-1.29,-1.29) R11(-0.43,-1.29) R13(0.43,-1.29) R15(1.29,-1.29) R17(2.15,-1.29) R19(3.01,-1.29) R21(3.87,-1.29) R23(4.73,-1.29) T2(-4.3,-1.72) T4(-3.44,-1.72) T6(-2.58,-1.72) T8(-1.72,-1.72) T10(-0.86,-1.72) T12(0,-1.72) T14(0.86,-1.72) T16(1.72,-1.72) T18(2.58,-1.72) T20(3.44,-1.72) T22(4.3,-1.72) U1(-4.73,-2.15) U3(-3.87,-2.15) U5(-3.01,-2.15) U7(-2.15,-2.15) U9(-1.29,-2.15) U11(-0.43,-2.15) U13(0.43,-2.15) U15(1.29,-2.15) U17(2.15,-2.15) U19(3.01,-2.15) U21(3.87,-2.15) U23(4.73,-2.15) V2(-4.3,-2.58) V4(-3.44,-2.58) V6(-2.58,-2.58) V8(-1.72,-2.58) V10(-0.86,-2.58) V12(0,-2.58) V14(0.86,-2.58) V16(1.72,-2.58) V18(2.58,-2.58) V20(3.44,-2.58) V22(4.3,-2.58) W1(-4.73,-3.01) W3(-3.87,-3.01) W5(-3.01,-3.01) W7(-2.15,-3.01) W9(-1.29,-3.01) W11(-0.43,-3.01) W13(0.43,-3.01) W15(1.29,-3.01) W17(2.15,-3.01) W19(3.01,-3.01) W21(3.87,-3.01) W23(4.73,-3.01) Y2(-4.3,-3.44) Y4(-3.44,-3.44) Y6(-2.58,-3.44) Y8(-1.72,-3.44) Y10(-0.86,-3.44) Y12(0,-3.44) Y14(0.86,-3.44) Y16(1.72,-3.44) Y18(2.58,-3.44) Y20(3.44,-3.44) Y22(4.3,-3.44)

## Nets
AVDD14_RX: C11.2 C12.2 C13.2 C14.2 C15.2 C95.2 C96.2 C97.2 FB8.2 U1.J6(AVDD14_B) U1.L6(AVDD14_RX1) U1.N6(AVDD14_RX2) U1.R6(AVDD14_RX3) U1.U6(AVDD14_RX4)
AVDD14_SX: C35.2 C36.2 C37.2 C38.2 C98.2 C99.2 C100.2 FB9.2 U1.E17(AVDD14_SX1) U1.E18(AVDD14_SX2) U1.G14(AVDD14_SX3) U1.K12(AVDD14_LO)
AVDD14_TX: C1.2 C2.2 C3.2 C4.2 C5.2 C90.2 C91.2 C92.2 FB7.2 U1.E5(AVDD14_TX1) U1.E7(AVDD14_TX2) U1.E9(AVDD14_TX3) U1.E11(AVDD14_TX4) U1.E13(AVDD14_TX5)
AVDD18_RX: C16.2 C17.2 C18.2 C19.2 C20.2 C21.2 C22.2 C72.2 C73.2 C74.2 FB3.2 U1.E2(AVDD18_B1) U1.F2(AVDD18_B2) U1.J5(AVDD18_RX1) U1.L5(AVDD18_RX2) U1.N5(AVDD18_RX3) U1.R5(AVDD18_RX4) U1.U5(AVDD18_RX5)
AVDD18_TX: C6.2 C7.2 C8.2 C9.2 C10.2 C66.2 C67.2 C68.2 FB1.2 U1.F5(AVDD18_TX1) U1.F7(AVDD18_TX2) U1.F9(AVDD18_TX3) U1.F11(AVDD18_TX4) U1.F13(AVDD18_TX5)
AVDD18_XO: C39.2 C75.2 C76.2 C77.2 R48.2 U1.K17(AVDD18_XO)
DVDD14: C23.2 C24.2 C25.2 C26.2 C27.2 C40.2 C41.2 C42.2 C104.2 C105.2 C106.2 FB11.2 U1.K18(AVDD14_BBPLL) U1.L9(AVDD14_AD1) U1.N9(AVDD14_AD2) U1.N12(DVDD14_1) U1.N13(DVDD14_2) U1.N14(DVDD14_3) U1.R9(AVDD14_AD3) U1.U9(AVDD14_AD4)
DVDD18: C28.2 C29.2 C30.2 C31.2 C32.2 C33.2 C81.2 C82.2 C83.2 FB5.2 U1.G17(AVDD18_GPADC) U1.H15(AVDD18_BG) U1.K9(AVDD18_AD1) U1.L17(DVDD18) U1.M9(AVDD18_AD2) U1.P9(AVDD18_AD3) U1.P13(AVDD18_TOP) U1.T9(AVDD18_AD4)
DVDD_GPIO: C44.2 C45.2 C46.2 FB6.2 R31.1 U1.T17(DVDD_GPIO1) U1.T18(DVDD_GPIO2) U1.U11(DVDD_GPIO3)
GND: C1.1 C2.1 C3.1 C4.1 C5.1 C6.1 C7.1 C8.1 C9.1 C10.1 C11.1 C12.1 C13.1 C14.1 C15.1 C16.1 C17.1 C18.1 C19.1 C20.1 C21.1 C22.1 C23.1 C24.1 C25.1 C26.1 C27.1 C28.1 C29.1 C30.1 C31.1 C32.1 C33.1 C35.1 C36.1 C37.1 C38.1 C39.1 C40.1 C41.1 C42.1 C44.1 C45.1 C46.1 C48.1 C49.1 C50.1 C51.1 C52.2 C53.2 C57.2 C66.1 C67.1 C68.1 C70.1 C72.1 C73.1 C74.1 C75.1 C76.1 C77.1 C81.1 C82.1 C83.1 C84.1 C85.1 C87.2 C88.2 C90.1 C91.1 C92.1 C93.1 C94.1 C95.1 C96.1 C97.1 C98.1 C99.1 C100.1 C104.1 C105.1 C106.1 C116.2 C128.1 C129.1 C130.1 C131.1 C132.2 C135.2 C136.1 C137.1 C138.1 C139.1 C142.2 C143.1 C145.1 C146.1 C147.1 C148.2 C149.1 C150.2 C193.2 C194.2 C198.2 C200.2 C205.1 C206.2 C208.2 C209.2 C210.2 C214.2 C215.2 C216.2 C217.2 C220.1 C221.2 C223.2 C224.2 C227.2 C229.2 C232.2 C234.2 C237.2 C244.2 C247.2 C249.1 C252.1 C253.1 C254.2 C257.2 C258.2 C260.2 C261.1 C264.2 C265.2 C266.2 C267.2 C268.2 C269.2 C270.2 C271.2 C272.1 D2.2 ESD15.2(CATHODE) ESD16.2(CATHODE) ESD17.2(CATHODE) ESD18.2(CATHODE) ESD19.2(CATHODE) ESD20.2(CATHODE) ESD21.2(CATHODE) ESD22.2(CATHODE) H1.1 H2.1 H3.1 H4.1 J2.2 J2.11 J2.12 J3.8 J3.15 J3.16 R4.2 R12.2 R28.1 R40.2 R54.2 R56.1 R57.1 R63.1 R67.1 R73.2 R74.1 R77.2 R86.1 R89.1 R98.1 R99.1 R100.1 TP31.1(A) TP42.1(A) U1.A2(G_AVSS_RF1) U1.A3(G_AVSS_RF2) U1.A4(G_AVSS_RF3) U1.A5(G_AVSS_RF4) U1.A6(TX4) U1.A7(G_AVSS_RF5) U1.A8(TX3) U1.A9(G_AVSS_RF6) U1.A11(G_AVSS_RF7) U1.A13(G_AVSS_RF8) U1.A14(G_AVSS_RF9) U1.A15(G_AVSS_RF10) U1.A16(LO_SYNCI) U1.A17(G_AVSS_RF11) U1.A18(G_AVSS_RF12) U1.B1(G_AVSS_RF13) U1.B2(G_AVSS_RF14) U1.B3(G_AVSS_RF15) U1.B4(G_AVSS_RF16) U1.B5(G_AVSS_RF17) U1.B7(G_AVSS_RF18) U1.B9(G_AVSS_RF19) U1.B11(G_AVSS_RF20) U1.B13(G_AVSS_RF21) U1.B14(G_AVSS_RF22) U1.B15(G_AVSS_RF23) U1.B16(G_AVSS_RF24) U1.B17(G_AVSS_RF25) U1.B18(G_AVSS_RF26) U1.B19(G_AVSS_RF27) U1.C1(G_AVSS_RF28) U1.C2(LO_SYNCO2) U1.C3(G_AVSS_RF29) U1.C5(G_AVSS_RF30) U1.C7(G_AVSS_RF31) U1.C9(G_AVSS_RF32) U1.C11(G_AVSS_RF33) U1.C13(G_AVSS_RF34) U1.C14(G_AVSS_RF35) U1.C15(G_AVSS_RF36) U1.C16(G_AVSS_RF37) U1.C17(G_AVSS_RF38) U1.C18(G_AVSS_RF39) U1.C19(LO_SYNCO) U1.D1(G_AVSS_RF40) U1.D2(G_AVSS_RF41) U1.D3(G_AVSS_RF42) U1.D5(G_AVSS_RF43) U1.D7(G_AVSS_RF44) U1.D9(G_AVSS_RF45) U1.D11(G_AVSS_RF46) U1.D13(G_AVSS_RF47) U1.D16(G_AVSS_RF48) U1.D17(G_AVSS_RF49) U1.D18(G_AVSS_RF50) U1.D19(G_AVSS_RF51) U1.E1(G_AVSS_RF52) U1.E3(G_AVSS_RF53) U1.E19(ACT_SX) U1.F1(G_AVSS_RF54) U1.F3(G_AVSS_RF55) U1.F14(G_AVSS_RF56) U1.F17(G_AVSS_RF57) U1.F18(G_AVSS_RF58) U1.F19(G_AVSS_RF59) U1.G1(G_AVSS_RF60) U1.G2(G_AVSS_RF61) U1.G3(G_AVSS_RF62) U1.G5(G_AVSS_RF63) U1.G7(G_AVSS_RF64) U1.G9(G_AVSS_RF65) U1.G11(G_AVSS_RF66) U1.G13(G_AVSS_RF67) U1.G19(G_AVSS43) U1.H1(G_AVSS_RF68) U1.H2(G_AVSS_RF69) U1.H3(G_AVSS_RF70) U1.H13(G_AVSS_RF71) U1.H14(G_AVSS42) U1.H16(G_AVSS41) U1.H17(G_AVSS40) U1.H19(ACT_BBPLL) U1.J1(G_AVSS_RF72) U1.J2(G_AVSS_RF73) U1.J3(G_AVSS_RF74) U1.J4(G_AVSS_RF75) U1.J7(G_AVSS_RF76) U1.J16(G_AVSS39) U1.J17(G_AVSS38) U1.J18(XTAL_SYNCI) U1.K10(G_AVSS37) U1.K11(G_AVSS_RF77) U1.K16(XTAL_SYNCO) U1.L1(G_AVSS_RF112) U1.L2(G_AVSS_RF111) U1.L3(G_AVSS_RF110) U1.L4(G_AVSS_RF109) U1.L7(G_AVSS_RF108) U1.L10(G_AVSS36) U1.L11(G_AVSS_RF107) U1.L12(G_AVSS_RF106) U1.L13(G_DVSS25) U1.L14(G_AVSS35) U1.L16(G_AVSS34) U1.M10(G_AVSS33) U1.M11(G_DVSS24) U1.M12(G_DVSS23) U1.M13(G_DVSS22) U1.M14(G_DVSS21) U1.M17(G_DVSS20) U1.N1(G_AVSS_RF105) U1.N2(G_AVSS_RF104) U1.N3(G_AVSS_RF103) U1.N4(G_AVSS_RF102) U1.N7(G_AVSS_RF101) U1.N10(G_AVSS32) U1.N11(G_DVSS19) U1.N17(G_DVSS18) U1.P10(G_AVSS31) U1.P11(G_DVSS17) U1.P12(G_DVSS16) U1.P16(G_DVSS15) U1.P17(G_DVSS14) U1.R1(G_AVSS_RF100) U1.R2(G_AVSS_RF99) U1.R3(G_AVSS_RF98) U1.R4(G_AVSS_RF97) U1.R7(G_AVSS_RF96) U1.R10(G_AVSS30) U1.R11(G_DVSS13) U1.R14(G_AVSS29) U1.R15(ACT_32K) U1.R16(G_DVSS12) U1.R17(G_DVSS11) U1.T10(G_AVSS28) U1.T11(G_DVSS10) U1.T15(G_DVSS9) U1.T19(G_DVSS8) U1.U1(G_AVSS_RF95) U1.U2(G_AVSS_RF94) U1.U3(G_AVSS_RF93) U1.U4(G_AVSS_RF92) U1.U7(G_AVSS_RF91) U1.U10(G_AVSS27) U1.U15(FSYNCI) U1.U17(G_DVSS7) U1.U18(G_DVSS6) U1.U19(G_DVSS5) U1.V1(G_AVSS_RF90) U1.V2(G_AVSS_RF89) U1.V3(G_AVSS_RF88) U1.V4(G_AVSS_RF87) U1.V5(G_AVSS_RF86) U1.V6(G_AVSS_RF85) U1.V7(G_AVSS_RF84) U1.V8(PGAP_TP) U1.V9(AD_EXTCLK) U1.V10(G_DVSS4) U1.V11(G_DVSS3) U1.V16(FSYNCO) U1.V18(SCAN_EN_TOP) U1.W2(G_AVSS_RF83) U1.W3(G_AVSS_RF82) U1.W4(G_AVSS_RF81) U1.W5(G_AVSS_RF80) U1.W6(G_AVSS_RF79) U1.W7(G_AVSS_RF78) U1.W8(PGAN_TP) U1.W9(G_AVSS26) U1.W10(G_DVSS2) U1.W15(TESTMODE) U1.W18(G_DVSS1) U4.3(GND) U8.2(GND) U10.2(GND) U11.2(GND) U12.2(GND) U14.10(GND) U15.2(GND) U16.2(GND) U19.4(VSS) U21.C15(DDR_VSSA) U21.D8(VSS_0) U21.D10(VSS_1) U21.D12(VSS_2) U21.D14(VSS_3) U21.E9(VSS_4) U21.E17(VSS_5) U21.F8(VSS_6) U21.F10(VSS_7) U21.F12(VSS_8) U21.F14(VSS_9) U21.F16(VSS_10) U21.G13(VSS_11) U21.G17(VSS_12) U21.H8(VSS_13) U21.H12(VSS_14) U21.J7(VSS_15) U21.J9(VSS_16) U21.J17(VSS_17) U21.K10(VSS_18) U21.K12(VSS_19) U21.K16(VSS_20) U21.L5(VSS_RTC) U21.L11(VSS_21) U21.L13(VSS_22) U21.L15(VSS_23) U21.L17(VSS_24) U21.M4(PLL_AVSS) U21.M6(PLL_VSS) U21.M8(VSS_25) U21.M12(VSS_26) U21.N7(VSS_27) U21.N11(VSS_28) U21.P8(VSS_29) U21.P12(VSS_30) U21.P18(DSI_AVSS) U21.R7(VSS_31) U21.R9(VSS_32) U21.R11(VSS_33) U21.T10(VSS_34) U21.T14(VSS_35) U21.T16(VSS_36) U21.T18(CSI_AVSS) U21.U9(VSS_37) U21.U13(VSS_38) U21.U15(VSS_39) U21.U17(VSS_40) U21.V8(USB_AVSS) U21.W7(SADC_AVSS) U21.W9(CODEC_AVSS) Y1.2 Y1.4 Y2.2 Y2.4 Y4.2 Y4.4
VDD12_MEM: C93.2 C94.2 C151.2 C214.1 C215.1 C223.1 C225.1 C227.1 C266.1 C267.1 L14.1 R64.2 R87.2 U21.A9(VDDMEM_0) U21.A11(VDDMEM_1) U21.B10(VDDMEM_2) U21.C9(VDDMEM_3) U21.C11(VDDMEM_4) U21.D16(VDDMEM_5) U21.E11(VDDMEM_6) U21.E13(VDDMEM_7) U21.E15(VDDMEM_8)
VIN_12V: C260.1 C261.2 D3.1 R102.1 U4.4(IN)
BOOT_SEL0: R98.2 U21.P6(BOOT_SEL0/PE25)
BOOT_SEL1: J3.3 R99.2 TP36.1(A) U21.N5(BOOT_SEL1/PE26)
BOOT_SEL2: R100.2 U21.P4(BOOT_SEL2/PE27)
BUCK_1V8: C138.2 C140.2 C146.2 C194.1 C229.1 C232.1 C234.1 C247.1 FB16.1 FB17.2 J3.4 L12.1 R75.2 R83.1 R93.2 R94.2 TP43.1(A) U8.1(EN) U16.1(EN) U21.AA7(USB_AVD18) U21.AB10(CODEC_AVDD) U21.AC3(SADC_AVDD) U21.B12(DDR_VDD1_0) U21.C13(DDR_VDD1_1) U21.H2(VDDIO_RTC) U21.K8(VDDIO_0) U21.L7(VDDIO_1) U21.N17(VDDIO18_0) U21.P20(DSI_AVD18) U21.R17(VDDIO18_1) U21.T8(VDDIO18_CIM) U21.T20(CSI_AVD18)
BUCK_3V3: C57.1 C139.2 C141.2 C143.2 C193.1 C237.1 C254.1 FB12.1 FB13.1 L11.1 R53.2 R97.2 R101.2 R103.1 U11.1(EN) U19.8(VCC) U21.M16(VDDIO33_0) U21.P16(VDDIO33_1) U21.U7(VDDIO33_CIM) U21.Y8(USB_AVD33)
BUCK_CORE: C147.2 C149.2 C153.2 C206.1 C208.1 C209.1 C216.1 C217.1 C221.1 C244.1 C249.2 C268.1 C269.1 C270.1 C271.1 FB18.2 L13.1 R61.2 U21.AB6(USB_AVD09) U21.G9(VDD_0) U21.G11(VDD_1) U21.G15(VDD_2) U21.H10(VDD_3) U21.H14(VDD_4) U21.H16(VDD_5) U21.J1(VDD_RTC) U21.J11(VDD_6) U21.J13(VDD_7) U21.J15(VDD_8) U21.K14(VDD_9) U21.L9(VDD_10) U21.M10(VDD_11) U21.M14(VDD_12) U21.N9(VDD_13) U21.N13(VDD_14) U21.N15(VDD_15) U21.N19(DSI_AVD09) U21.P10(VDD_16) U21.P14(VDD_18) U21.R13(VDD_19) U21.R15(VDD_20) U21.R19(CSI_AVD09)
CANH: C133.2 ESD15.1(ANODE) J2.10 R71.2 U12.7(CANH)
CANL: C134.1 ESD16.1(ANODE) J2.9 R72.1 U12.6(CANL)
CASCADE: R57.2 U1.P15(CASCADE)
CH_1V4: C86.2 C87.1 C88.1 FB7.1 FB8.1 FB9.1 FB11.1 L5.2 R51.1
CH_1V8: C116.1 FB1.1 FB3.1 FB5.1 FB6.1 R48.1 R83.2
CKN_PHY: U1.N18(PHY_CKN) U21.V22(RX_CLKN0)
CKP_PHY: U1.N19(PHY_CKP) U21.U21(RX_CLKP0)
D0N_PHY: U1.L19(PHY_D0N) U21.R21(RX_DATAN0)
D0P_PHY: U1.L18(PHY_D0P) U21.R23(RX_DATAP0)
D1N_PHY: U1.M19(PHY_D1N) U21.U23(RX_DATAN1)
D1P_PHY: U1.M18(PHY_D1P) U21.T22(RX_DATAP1)
D2N_PHY: U1.P18(PHY_D2N) U21.W23(RX_DATAN2)
D2P_PHY: U1.P19(PHY_D2P) U21.W21(RX_DATAP2)
D3N_PHY: U1.R18(PHY_D3N) U21.AA23(RX_DATAN3)
D3P_PHY: U1.R19(PHY_D3P) U21.Y22(RX_DATAP3)
DDR_VREF: C224.1 C225.2 R86.2 R87.1 U21.A13(VREF)
EXCLKI: C52.1 R18.1 U21.N1(EXCLK_XI) Y4.1
EXCLKO: R18.2 R90.2 U21.N3(EXCLK_XO)
EXT_12V: C272.2 F1.1 J2.1 TP14.1(A)
INT: TP28.1(A) U1.T14(INTERRUPT)
MSC2_CLK: J3.14 U21.W13(MSC2_CLK/PWM2/TCU1_IN0/PE00)
MSC2_CMD: J3.12 U21.W11(MSC2_CMD/PWM3/TCU1_IN1/PE01)
MSC2_D0: J3.9 U21.Y10(MSC2_D0/PWM4/TCU2_IN0/PE02)
MSC2_D1: J3.11 U21.V10(MSC2_D1/PWM5/TCU2_IN1/PE03)
MSC2_D2: J3.10 U21.Y12(MSC2_D2/PWM6/TCU3_IN0/PE04)
MSC2_D3: J3.13 U21.V12(MSC2_D3/PWM7/TCU3_IN1/PE05)
PB26/RST: R70.1 U14.19(RST) U21.G19(SD10/LCD_HSYNC/SLCD_WR/PB26)
PB27/INT: U14.13(INT) U21.C19(SD11/LCD_DE/SLCD_TE/PB27)
PB28/CS: U14.18(CS) U21.F20(SD12/SSI0_CE0_N/UART8_RXD/PB28)
PB29/MISO: U14.17(SO) U21.F18(SD13/SSI0_DR/UART8_TXD/PB29)
PB30/MOSI: U14.16(SI) U21.E19(SD14/SSI0_DT/UART9_RXD/PB30)
PB31/CLK: U14.14(SCK) U21.D18(SD15/SSI0_CLK/UART9_TXD/PB31)
PC01/BEEP: ESD20.1(ANODE) J2.5 U21.Y20(PWM1/TCU0_IN1/RMII0_PHY_CLK/I2S)
PC02/LED_L: ESD22.1(ANODE) J2.3 U21.AC17(PWM2/TCU1_IN0/RMII0_TXD0/I2S1_R)
PC03/LED_R: ESD21.1(ANODE) J2.4 U21.AB16(PWM3/TCU1_IN1/RMII0_TXD1/I2S1_R)
PC04/BACK_IN: ESD17.1(ANODE) J2.8 U21.Y16(PWM4/TCU2_IN0/I2S1_RX_DATA/SCC_)
PD05/CH_RST: C51.2 R31.2 U1.V19(SRSTB) U21.B8(I2C5_SDA/PCM_SYNC/PD05)
POR_BYPASS: R56.2 U1.P14(POR_BYPASS)
PPRST_N: C252.2 R93.1 U21.K6(PPRST_N)
RX1: RX1.1 U1.K1(RX1)
RX2: RX2.1 U1.M1(RX2)
RX3: RX3.1 U1.P1(RX3)
RX4: RX4.1 U1.T1(RX4)
RXCAN: U12.4(RXD) U14.2(RXCAN)
SFC0_CE_N: R103.2 U19.1(CS_N) U21.AB12(SFC0_CE_N/SSI1_DT/PE17)
SFC0_CLK: U19.6(CLK) U21.AC13(SFC0_CLK/SSI1_CLK/PE16)
SFC0_DQ0: U19.5(DI(DQ0)) U21.AA13(SFC0_DQ0/SSI1_DR/PE18)
SFC0_DQ1: U19.2(DO(DQ1)) U21.AA15(SFC0_DQ1/I2C2_SCK/PE19)
SFC0_DQ2: U19.3(WP_N(DQ2)) U21.AC15(SFC0_DQ2_WP_N/I2C2_SDA/PE20)
SFC0_DQ3_HOLD_N: U19.7(HOLD_N(DQ3)) U21.AB14(SFC0_DQ3_HOLD_N/SSI1_CE0_N/PE21)
SPI_CLK: U1.W17(SPI_CLK) U21.G1(MSC0_CLK/SFC0_CLK/SSI1_CLK/PD17)
SPI_CS: U1.U16(SPI_CS) U21.E3(MSC0_D3/SFC0_DQ3_HOLD_N/SSI1_CE)
SPI_MISO: U1.V17(SPI_MISO) U21.E1(MSC0_D0/SFC0_DQ0/SSI1_DR/PD19)
SPI_MOSI: U1.W16(SPI_MOSI) U21.G3(MSC0_CMD/SFC0_CE_N/SSI1_DT/PD18)
TX1: TX3.1 U1.A12(TX1)
TX2: TX2.1 U1.A10(TX2)
TXCAN: U12.1(TXD) U14.1(TXCAN)
UART2_RXD: J3.1 TP37.1(A) U21.B4(UART2_RXD/I2C3_SCK/PWM0/TCU0_IN)
UART2_TXD: J3.2 TP38.1(A) U21.C5(UART2_TXD/I2C3_SDA/PWM1/TCU0_IN)
UART3_RXD: ESD18.1(ANODE) J2.7 R97.1 U21.B16(UART3_RXD/I2C4_SCK/PC25)
UART3_TXD: ESD19.1(ANODE) J2.6 U21.A17(UART3_TXD/I2C4_SDA/PC26)
USB_DN: J3.6 TP40.1(A) U21.AA5(USB_DM0)
USB_DP: J3.7 TP41.1(A) U21.AC5(USB_DP0)
VSYS: C84.2 C85.2 C136.2 C142.1 C145.2 C148.1 C150.1 C256.1 C257.1 C258.1 J3.5 L2.2 R11.1 R50.2 R76.1 TP39.1(A) U8.4(VIN) U10.4(VIN) U11.4(VIN) U12.3(VCC) U15.4(VIN) U16.4(VIN)
WKUP_N: C253.2 R94.1 U21.L3(WKUP_N/PE31)
N2439824: C86.1 R51.2 R54.1 U10.5(FB)
N2440064: L5.1 U10.3(SW)
N2464554: C48.2 U1.J19(XTALI) Y1.1
N2465035: C49.2 U1.K19(XTALO) Y1.3
N2479306: R28.2 U1.G18(BGR)
N2558545: C50.2 U1.H18(DCT_GPADC)
N2669126: R50.1 U10.1(EN)
N2735799: C128.2 C129.2 FB12.2 R70.2 U14.20(VDD)
N2735943: C131.2 U14.9(OSC1) Y2.1
N2735967: C130.2 U14.8(OSC2) Y2.3
N2736087: C133.1 C134.2 C135.1
N2736303: C132.1 R71.1 R72.2
N2736527: R73.1 U12.8(STB)
N2736623: C137.2 FB13.2 U12.5(VIO)
N2737540: C141.1 R53.1 R77.1 U8.5(FB)
N2737548: R76.2 U15.1(EN)
N2737552: C140.1 R74.2 R75.1 U15.5(FB)
N2737610: L12.2 U15.3(SW)
N2737826: L11.2 U8.3(SW)
N2738138: D2.1 D3.2 F1.2
N2739230: C153.1 R61.1 R63.2 U16.5(FB)
N2739292: L13.2 U16.3(SW)
N2739406: C151.1 R64.1 R67.2 U11.5(FB)
N2739468: L14.2 U11.3(SW)
N16675046: C53.1 R90.1 Y4.3
N16679120: C205.2 C264.1 FB17.1 U21.L1(PLL_AVDD)
N16679422: R40.1 U21.AC7(USB_BIAS)
N16679836: C198.1 R101.1 U21.T12(VDDIO33_SD)
N16679980: C220.2 C265.1 FB18.1 U21.M2(PLL_VDD)
N16679984: C200.1 FB16.2 U21.A15(DDRPLL_VCCA)
N16680310: R4.1 U21.B14(ZQ)
N16680330: R89.2 U21.A5(AVDEFUSE)
N16680520: C210.1 U21.U11(VDDIO18_SD)
N16681692: C70.2 U21.AC9(CODEC_VCM)
N16703806: C263.1 L2.1 U4.5(LX)
N16704000: C256.2 R11.2 R12.1 U4.1(FB)
N16708145: C263.2 U4.6(BS)
N16719733: R102.2 U4.2(EN)

Pads without a net: U1 A1 A19 R12 R13 T12 T13 U12 U13 U14 V12 V13 V14 V15 W1 W11 W12 W13 W14 W19; U14 3 4 5 6 7 11 12 15; U21 A1 A3 A7 A19 A21 A23 AA1 AA3 AA9 AA11 AA17 AA19 AA21 AB2 AB4 AB8 AB18 AB20 AB22 AC1 AC11 AC19 AC21 AC23 B2 B6 B18 B20 B22 C1 C3 C7 C17 C21 C23 D2 D4 D6 D20 D22 E5 E7 E21 E23 F2 F4 F6 F22 G5 G21 G23 H4 H6 H18 H20 H22 J3 J5 J19 J21 J23 K2 K4 K18 K20 K22 L19 L21 L23 M18 M20 M22 N21 N23 P2 P22 R1 R3 R5 T2 T4 T6 U1 U3 U5 U19 V2 V4 V6 V14 V16 V18 V20 W1 W3 W5 W15 W17 W19 Y2 Y4 Y6 Y14 Y18

## Via types
v1: diameter 0.3, hole 0.15, 03-POWER to BOTTOM, 423 vias
v2: diameter 0.4, hole 0.2, TOP to BOTTOM, 460 vias
v3: diameter 0.23, hole 0.15, 03-POWER to BOTTOM, 3 vias
v4: diameter 0.23, hole 0.15, TOP to 02-GND1, 155 vias
v5: diameter 0.3, hole 0.15, TOP to 02-GND1, 504 vias

## Routing (per net, layer and track width the routed paths; a pad name or vN(x,y) marks a point on that pad's centre or on a via; arc(x,y) is an arc through that point)
AVDD14_RX: length 13.8
  TOP w0.22: U1.R6 v2(9.75,22.97) U1.U6 ; U1.N6 v2(10.38,23.59) ; U1.L6 v2(11.03,24.24) ; U1.J6 v2(11.65,24.86)
  BOTTOM w0.4: C11.2 v2(11.65,24.86) ; C11.2 C14.2 ; C11.2 11.91,25.13 C12.2 ; C15.2 C14.2 ; C15.2 C13.2 ; C15.2 v2(10.38,23.59) ; C14.2 v2(11.03,24.24) ; FB8.2 7.15,26.01 C95.2 C96.2 C97.2 8.09,24.35 8.09,23.18 8.74,22.53 9.31,22.53 C13.2 ; C13.2 v2(9.75,22.97)
AVDD14_SX: length 9.5
  TOP w0.3: U1.G14 v2(15.45,23.06) ; v2(16.45,23.34) U1.E17 U1.E18 ; U1.K12 v2(13.77,23.24)
  BOTTOM w0.35: C35.2 15.86,23.14 15.86,23.13 ; v2(13.77,23.24) C36.2 v2(15.45,23.06) 15.86,23.13 ; 15.86,23.13 16.05,23.34
  BOTTOM w0.4: 16.05,23.34 v2(16.45,23.34) 16.48,23.37 C38.2 16.95,24.23 C37.2 17.42,24.23 C100.2 17.1,25.2 C99.2 16.69,25.62 C98.2 16.69,26.16 FB9.2
AVDD14_TX: length 12.9
  TOP w0.22: v2(13.9,25.94) U1.E9 ; U1.E5 v2(13.25,26.59) U1.E7 ; v2(14.52,25.31) U1.E11 ; U1.E13 v2(15.17,24.66)
  BOTTOM w0.4: C2.2 v2(13.9,25.94) 13.58,26.27 ; C2.2 C4.2 ; C2.2 13.58,26.27 ; C4.2 v2(14.52,25.31) ; C4.2 v2(15.17,24.66) C5.2 C4.2 ; FB7.2 14.83,29.48 C90.2 14.16,28.79 C91.2 C92.2 13.5,28.13 12.77,27.4 12.77,27.08 C1.2 ; 13.58,26.27 C1.2 ; C1.2 v2(13.25,26.59)
AVDD18_RX: length 13.7
  TOP w0.22: U1.U5 v2(9.32,23.39) ; U1.N5 v2(10.6,24.67) ; 9.71,23.67 v2(9.97,24.04)
  TOP w0.3: U1.L5 v2(11.25,25.29) U1.J5
  02-GND1 w0.3: v4(11.62,27.49) 11.62,27.81 ; 11.62,27.81 v4(11.94,27.81) ; 11.62,27.81 11.16,28.26 v2(11.16,28.26)
  BOTTOM w0.3: v2(11.16,28.26) 11.09,28.19 11.09,27.94 C22.2 10.95,27.81 10.49,27.34 10.55,27.27 10.55,26.91
  BOTTOM w0.4: FB3.2 8.9,27.92 C72.2 9.57,27.24 C73.2 C74.2 10.55,26.91 10.64,26.91 11.4,26.15 11.4,25.83 C16.2 v2(11.25,25.29) C17.2 v2(10.6,24.67) C18.2 9.97,24.04 v2(9.97,24.04) 9.64,23.71 C19.2 9.64,23.7 v2(9.32,23.39) 9.02,23.09 C20.2
AVDD18_TX: length 13
  TOP w0.22: v2(14.15,24.86) U1.F11 ; U1.F13 v2(14.77,24.24) ; U1.F5 v2(12.84,26.15) U1.F7 ; v2(13.47,25.51) U1.F9
  BOTTOM w0.4: C8.2 C7.2 ; C8.2 v2(14.15,24.86) C9.2 ; C8.2 C9.2 ; C7.2 C6.2 12.52,26.49 12.19,26.82 12.19,27.58 C68.2 12.06,28.45 11.53,28.99 C67.2 C66.2 11.52,30.15 FB1.2 ; C7.2 v2(13.47,25.51) ; C7.2 v2(12.84,26.15) ; v2(14.77,24.24) C10.2 C9.2
AVDD18_XO: length 5.9
  02-GND1 w0.2: v2(13.9,21.56) 14.43,21.56 14.55,21.44 v4(15.12,21.44)
  BOTTOM w0.28: C39.2 14.7,21.26 14.37,21.6 13.93,21.6 v2(13.9,21.56)
  BOTTOM w0.35: C39.2 15.45,21.26 15.59,21.13 C77.2 C76.2 C75.2 15.59,18.5 R48.2
DVDD14: length 23.5
  TOP w0.22: U1.L9 v2(12.24,24.23) ; U1.R9 v2(10.77,22.63) ; U1.N9 v2(11.51,23.33) ; U1.U9 v2(10.08,21.93)
  TOP w0.3: v2(13.43,21.23) 13.22,21.44 U1.N14 U1.N13 U1.N12
  TOP w0.4: v2(14.56,26.58) 14.84,26.86 v2(14.84,26.86)
  02-GND1 w0.2: v2(17.3,19.58) 16.91,19.58 16.45,20.03 16.11,20.03 15.44,20.71 v4(15.44,21.12)
  03-POWER w0.25: v2(17.3,19.58) 16.56,19.58 15.9,20.24 15.9,21.89 16.25,22.23 16.25,22.88 15.98,23.15 15.98,23.42 15.98,23.42 ; 10.84,22.56 11.21,22.56 ; 10.65,21.92 10.65,21.93 v2(10.08,21.93) ; 10.78,22.19 10.77,22.2 v2(10.77,22.63) ; 11.54,23.3 11.93,23.3 ; 11.57,22.88 11.57,23.27 v2(11.51,23.33) ; v2(12.24,24.23) 12.32,24.15 12.32,23.69 12.35,23.69
  03-POWER w0.35: 12.65,23.82 12.24,24.23 v2(12.24,24.23) 12.5,24.23 12.71,24.02 ; v2(11.51,23.33) 11.51,23.33 11.87,22.96 ; v2(10.08,21.93) 10.45,21.56 10.47,21.56 ; 11.12,22.31 11.09,22.31 v2(10.77,22.63)
  BOTTOM w0.2: C27.2 v2(17.3,19.58)
  BOTTOM w0.3: C25.2 v2(12.24,24.23) ; C26.2 10.08,21.54 10.07,21.72 v2(10.08,21.93) ; C42.2 v2(13.43,21.23) ; C23.2 v2(10.77,22.63) ; C24.2 v2(11.51,23.33)
  BOTTOM w0.4: v2(14.56,26.58) 14.84,26.86 v2(14.84,26.86) C106.2 C105.2 16.41,28.43 C104.2 16.41,29.18 FB11.2
DVDD18: length 15.9
  TOP w0.22: U1.M9 v2(11.84,23.72) ; U1.L17 v2(14.2,21.12) ; U1.K9 v2(12.96,24.55)
  TOP w0.3: U1.T9 v2(10.34,22.37) ; U1.H15 v2(14.89,22.49) ; U1.P9 v2(11.14,22.98) ; U1.G17 v2(15.8,22.64)
  TOP w0.4: v2(12.29,29.52) v2(12.29,29.96)
  02-GND1 w0.25: v4(12.57,21.44) v2(11.84,23.72)
  03-POWER w0.25: v2(11.84,23.72) 11.84,24.03 ; 11.09,23.5 11.09,23.04 v2(11.14,22.98) ; 11.81,23.75 11.53,23.75 ; 10,22.35 10.32,22.35 v2(10.34,22.37) 10.34,22.71 ; 10.68,23.05 10.95,23.05 11.02,22.98 11.11,22.98
  03-POWER w0.35: 10.77,23.31 11.11,22.98 v2(11.14,22.98) ; v2(11.84,23.72) 11.52,24.04 11.52,24.06 ; v2(10.34,22.37) 10.32,22.37 10.07,22.61
  BOTTOM w0.25: v2(10.34,22.37) 10.39,22.35 10.48,22.13 10.52,21.95 C33.2
  BOTTOM w0.3: C32.2 v2(12.96,24.55) ; C29.2 v2(11.14,22.98) ; C30.2 v2(11.84,23.72)
  BOTTOM w0.35: C28.2 v2(15.8,22.64) ; v2(14.89,22.49) 14.87,22.47 C31.2
  BOTTOM w0.4: C81.2 v2(12.29,29.52) v2(12.29,29.96) 12.29,30.3 C82.2 12.29,31.22 C83.2 12.3,31.32 11.65,31.97 FB5.2
DVDD_GPIO: length 9.3
  TOP w0.22: U1.T18 U1.T17 13,19.74 v2(12.97,19.74)
  02-GND1 w0.3: v4(10.98,21.12) v2(10.49,19.7)
  BOTTOM w0.2: R31.1 13.21,18.6 13.58,18.97 C46.2
  BOTTOM w0.3: v2(10.49,19.7) 10.53,19.74 C45.2
  BOTTOM w0.35: FB6.2 14.67,19.11 C44.2 C46.2 13.18,19.54 v2(12.97,19.74) C45.2
GND: length 60.8
  TOP w0.1: v2(16.55,21.06) 16.57,21.09 16.95,21.09 17.16,21.1 v2(17.21,21.05) ; 16.85,21.12 16.71,21.12 U1.H19 ; C49.1 18.23,19.77 18.33,19.67 ; U1.L12 v2(12.89,22.72) ; v5(4.51,30.63) 4.52,30.64 4.52,30.79 4.64,30.91 v5(4.7,30.91) ; C48.1 18,21.84
  TOP w0.15: U1.G19 v4(16.9,21.59)
  TOP w0.2: v2(13.66,18.25) 13.66,18.45 U1.U19 ; 12.57,18.26 12.57,18.03 v2(12.44,17.9)
  TOP w0.25: C49.1 17.84,20.24 17.64,20.05 17.08,20.05 ; v2(17.21,21.05) v2(17.49,21.34)
  TOP w0.3: 17.09,20.06 v2(17.05,20.02)
  TOP w0.4: 18,21.84 18.23,22.07 18.62,22.47 v2(19.06,22.47) ; 19.1,19.67 v2(19.08,19.67) 17.98,19.67 ; 19.1,19.67 19.1,19.68 Y1.2 ; 19.1,19.67 20.73,19.67 v2(20.74,19.66) v2(20.74,20.7) v2(20.74,21.65) 20.72,21.67 Y1.4 v2(20,22.45) ; C254.2 10.88,5.95 v2(11.13,6.21) ; C57.2 v2(7.82,5.95) ; v2(22.12,22.84) Y2.2 v5(21.28,22.1) ; Y2.4 v2(24.29,21.2) ; v2(15.65,5.08) 15.87,5.3 C205.1
  BOTTOM w0.1: C92.1 14.16,27.48 v1(14.51,27.48) ; 10.62,21.06 10.62,21.02 C26.1 ; v2(3.88,22.84) 3.78,22.93 3.09,22.93 3.09,22.74 2.94,22.59 2.73,22.59 2.59,22.74 2.59,22.93 2,22.93 1.9,23.03 1.9,23.65 ; 19.11,29.76 19.38,29.5 19.64,29.5 ; v2(3.6,23.61) 3.55,23.67 3.55,23.79 3.39,23.95 2.82,23.95 ; C2.1 14.59,25.96 14.67,25.96 ; 2.82,23.95 J2.11 1.9,23.65 ; 2.82,23.95 v2(3.77,24.9) ; 8,29.87 8,29.89 8.42,30.31 8.42,31.17 8.28,31.31 ; v2(2.85,23.59) 2.79,23.65 1.9,23.65 ; 11.35,27.58 v1(11.35,27.59)
  BOTTOM w0.15: C3.1 13.98,26.62 14.25,26.35 ; v2(19.39,30.74) 19.24,30.58 C93.1 ; v1(10.43,28.32) 10.59,28.16 C22.1 ; C68.1 11.43,27.51 v1(11.35,27.59)
  BOTTOM w0.25: U21.U15 14.68,11.59 v2(14.68,11.59) ; v2(13.82,8.15) 13.82,8.15 U21.V8 ; U21.F12 v2(18.98,9.87) ; v2(18.98,12.45) 18.98,12.45 U21.E17 ; U21.L5 16.4,7.29 v2(16.4,7.29) U21.M4 ; U21.P18 U21.T18 v2(14.68,13.31) ; v2(17.26,9.87) 17.26,9.87 U21.L11 ; U21.J7 18.12,8.15 v2(18.12,8.15) ; U21.R7 v2(15.11,8.58) ; U21.J9 17.26,9.01 v2(17.26,9.01) ; v2(16.83,10.3) 16.83,10.3 U21.L13 ; v2(17.26,12.45) 17.26,12.45 U21.K16 ; C76.1 16.84,20.22 v2(17.05,20.02) ; U21.E9 18.98,9.01 v2(18.98,9.01) ; v2(20.27,11.16) 20.27,11.16 U21.D14 ; 15.54,9.87 v2(15.54,9.87) 15.54,9.87 ; 15.54,9.87 U21.N11 ; v2(18.55,10.3) 18.55,10.3 U21.G13 ; U21.D10 v2(19.84,9.01) U21.D8 ; v2(9.64,5.33) 9.08,5.33 C136.1 ; v2(14.25,11.16) 14.25,11.16 U21.T14 ; U21.U17 v2(14.25,12.88) ; U21.L17 v2(16.83,12.02) ; U21.T10 14.68,9.87 v2(14.68,9.87) ; U21.J17 v2(18.12,12.45)
  BOTTOM w0.254: U21.W7 v2(13.82,8.15) ; U21.M8 v2(16.4,8.15) ; U21.K10 v2(17.26,9.01) ; U21.R11 v2(14.68,9.87) ; U21.H8 v2(18.12,8.15) ; U21.U13 v2(14.25,11.16) ; U21.M12 v2(16.83,10.3) ; U21.C15 v2(20.27,11.16) ; U21.F10 v2(18.98,9.87) ; U21.D12 v2(20.2,10.3) ; U21.L15 v2(16.83,12.02) ; U21.U9 v2(14.68,9.01) ; U21.R9 v2(15.11,8.58) ; U21.P8 v2(15.54,8.15) ; U21.H12 v2(18.55,10.3) ; U21.F8 v2(18.98,9.01) ; U21.T16 v2(14.68,11.59) ; U21.F16 v2(18.98,12.45) ; U21.P12 v2(15.54,9.87) ; U21.M6 v2(16.4,7.29) ; U21.G17 v2(18.12,12.45) ; U21.K12 v2(17.26,9.87)
  BOTTOM w0.3: ESD18.2 v2(6.62,14.74) ; ESD19.2 v2(6.67,15.99) ; ESD16.2 v2(5.85,11.64) ; v2(5.72,10.04) 5.85,9.91 ESD15.2 ; ESD17.2 v2(5.85,13.39)
  BOTTOM w0.35: C7.1 v2(13.1,25.14) C8.1
  BOTTOM w0.4: v2(13.09,4.03) Y4.4 13.8,4.83 v2(13.79,4.84) ; Y4.2 14.7,2.07 v2(14.68,2.04) v2(15.13,2.04) 15.14,2.05 C53.2 ; C52.2 v2(15.65,5.08)
  vias: v1(3.13,34.62) v1(3.32,39.71) v1(3.4,39.13) v1(3.43,38.53) v1(3.42,37.98) v1(3.39,37.34) v1(3.4,36.58) v1(3.48,39.98) v1(3.54,34.09) v1(3.61,39.56) v1(3.73,40.19) v1(3.85,39.89) v1(3.88,37.75) v1(3.86,37.11) v1(3.87,34.66) v1(3.97,40.37) v1(4.08,33.95) v1(4.24,40.05) v1(4.24,37.45) v1(4.23,36.56) v1(4.24,33.34) v1(4.41,40.36) v1(4.37,38.14) v1(4.58,39.87) v1(4.72,36.56) v1(4.71,34.12) v1(4.72,33.51) v1(4.74,32.84) v1(4.79,40.73) v1(4.77,40.16) v1(4.78,38.84) v1(4.76,37.38) v1(5.04,38.33) v1(4.98,37.8) v1(4.98,36.97) v1(5.45,38.75) v1(5.61,35.13) v1(5.76,37.67) v1(5.77,36.9) v1(5.76,36.2) v1(5.94,33.49) v1(6.11,32.66) v1(6.24,34.57) v1(6.34,38.43) v1(6.59,40.9) v1(6.62,33.92) v1(6.85,40.62) v1(6.81,33.27) v1(6.88,39.89) v1(6.86,38.94) v1(6.87,38.39) v1(7.03,40.28) v1(7.2,34.6) v1(7.44,40.3) v1(7.36,39.93) v1(7.42,33.92) v1(7.8,27.88) v1(7.77,27.04) v1(7.79,26.65) v1(7.84,26.18) v1(7.9,39.92) v1(7.88,27.4) v1(8.03,40.32) v1(8.24,34.6) v1(8.16,25.89) v1(8.5,40.89) v1(8.51,40.38) v1(8.51,39.97) v1(8.48,38.59) v1(8.62,38.13) v1(8.73,39.08) v1(8.71,37.61) v1(8.71,36.99) v1(8.88,40.92) v1(8.9,40.28) v1(8.95,38.54) v1(9.03,36.56) v1(9.14,39.94) v1(9.07,38.1) v1(9.16,37.69) v1(9.46,36.92) v1(9.55,38.05) v1(9.6,30.7) v1(9.67,37.41) v1(9.69,29.82) v1(9.68,28.01) v1(9.71,25.93) v1(9.78,28.62) v1(9.91,31.01) v1(9.85,29.23) v1(9.98,36.56) v1(10.19,40.48) v1(10.16,39.97) v1(10.15,38.1) v1(10.18,37.24) v1(10.21,29.01) v1(10.27,29.58) v1(10.63,30.14) v1(10.63,29.23) v1(10.83,29.68) v1(10.91,34.54) v1(10.89,32.89) v1(11,30.35) v1(11.01,28.78) v1(11.22,35.41) v1(11.33,37.62) v1(11.29,36.67) v1(11.3,33.73) v1(11.5,27.97) v1(11.84,38.44) v1(11.97,34.46) v1(12,32.9) v1(12.19,40.91) v1(12.45,39.19) v1(12.39,38.64) v1(12.55,40.51) v1(12.49,39.92) v1(12.53,33.74) v1(12.6,40.87) v1(12.63,32.34) v1(12.9,40.18) v1(12.88,30.89) v1(13.11,39.88) v1(13.13,34.46) v1(13.14,30.72) v1(13.18,32.92) v1(13.34,40.3) v1(13.33,30.42) v1(13.26,29.75) v1(13.3,28.68) v1(13.47,29.23) v1(13.65,39.89) v1(13.63,32.36) v1(13.57,30.72) v1(13.61,30.24) v1(13.69,29.82) v1(13.81,33.73) v1(13.91,40.46) v1(13.97,38.53) v1(13.95,16.45) v1(14.13,39.93) v1(14.1,29.51) v1(14.22,38.94) v1(14.19,38.06) v1(14.24,37.01) v1(14.16,27.56) v1(14.34,40.9) v1(14.3,34.45) v1(14.3,17.04) v1(14.36,40.39) v1(14.42,32.86) v1(14.47,38.58) v1(14.48,28.11) v1(14.62,38.08) v1(14.58,37.55) v1(14.6,36.56) v1(14.7,39.95) v1(14.69,37.09) v1(14.66,28.59) v1(14.8,19.78) v1(14.87,27.77) v1(15.04,38.02) v1(15.05,37.35) v1(15.02,28.86) v1(14.97,28.26) v1(15.09,36.86) v1(15.07,36.34) v1(15.06,20.15) v1(15.06,19.42) v1(15.23,28.5) v1(15.52,37.56) v1(15.48,28.8) v1(15.6,40.29) v1(15.55,36.56) v1(15.64,28.41) v1(15.77,38.88) v1(15.78,38.03) v1(15.86,38.51) v1(15.92,37.04) v1(15.96,27) v1(16.24,34.87) v1(16.22,30.88) v1(16.18,25.91) v1(16.25,26.72) v1(16.39,38.78) v1(16.43,27.69) v1(16.39,27.14) v1(16.39,24.95) v1(16.39,24.31) v1(16.37,21.39) v1(16.47,20.24) v1(16.47,18.98) v1(16.64,21.81) v1(16.72,36.33) v1(16.68,35.39) v1(16.66,22.68) v1(16.79,37.75) v1(16.82,34.77) v1(16.8,24.7) v1(16.99,27.96) v1(17.02,22.16) v1(17.11,23.56) v1(17.21,28.33) v1(17.17,22.98) v1(17.21,21.69) v1(17.34,38.4) v1(17.5,34.64) v1(17.72,40.89) v1(17.94,39.91) v1(17.91,39.06) v1(17.87,38.55) v1(18.08,40.39) v1(18.41,34.66) v1(18.47,39.95) v1(18.71,40.35) v1(19.03,39.93) v1(19.27,40.34) v1(19.47,40.87) v1(19.5,38.5) v1(19.64,39.92) v1(19.72,38.94) v1(19.71,37.85) v1(19.92,40.34) v1(19.94,38.53) v1(19.87,37.25) v1(19.98,40.86) v1(20.15,39.94) v1(20.12,38.07) v1(20.07,36.56) v1(20.36,37.61) v1(20.55,36.92) v1(20.55,40.3) v1(20.55,36.27) v1(20.71,38.12) v1(20.81,40.03) v1(20.84,31.76) v1(20.93,37.52) v1(20.91,32.09) v1(21.02,36.56) v1(21.04,31.43) v1(21.11,32.37) v1(21.18,39.97) v1(21.18,31.89) v1(21.25,40.56) v1(21.33,37.97) v1(21.29,37.1) v1(21.32,32.67) v1(21.41,38.61) v1(21.53,32.42) v1(21.62,32.83) v1(21.57,32) v1(21.61,31.66) v1(21.56,28.61) v1(21.73,38.41) v1(21.82,32.31) v1(21.92,38.84) v1(21.92,31.95) v1(22.14,32.2) v1(22.15,37.55) v1(22.17,36.88) v1(22.15,36.26) v1(22.34,33.73) v1(22.82,30.3) v1(22.81,29.45) v1(22.9,14.77) v1(22.9,14.43) v1(22.89,13.35) v1(22.97,14.01) v1(23.26,30.48) v1(23.3,14.45) v1(23.3,13.55) v1(23.3,12.35) v1(23.3,11.45) v1(23.3,10.55) v1(23.3,9.65) v1(23.3,7.05) v1(23.3,6.15) v1(23.39,29.87) v1(23.58,14.77) v1(23.58,13.99) v1(23.86,30.75) v1(24.09,31.92) v1(24.07,31.52) v1(24.43,32.12) v1(24.6,17.49) v2(0.43,40.78) v2(0.42,19.7) v2(0.44,18.69) v2(0.43,17.05) v2(0.44,15.42) v2(0.45,9.03) v2(0.45,8.4) v2(0.44,7.6) v2(0.43,6.75) v2(0.41,5.71) v2(0.43,4.68) v2(0.46,41.28) v2(0.46,40.28) v2(0.46,39.28) v2(0.46,38.28) v2(0.46,37.28) v2(0.46,36.28) v2(0.46,35.28) v2(0.46,34.28) v2(0.46,33.28) v2(0.46,32.28) v2(0.46,31.28) v2(0.46,30.28) v2(0.45,29.2) v2(0.46,28.69) v2(0.45,28.1) v2(0.48,24) v2(0.52,12.57) v2(0.49,11.65) v2(0.53,10.81) v2(0.48,9.92) v2(0.47,3.69) v2(1.68,43.1) v2(1.67,33.14) v2(1.69,32.21) v2(1.71,31.21) v2(2.18,22.55) v2(2.2,21.76) v2(2.19,21) v2(2.2,20.26) v2(2.82,24.45) v2(2.84,22.84) v2(2.86,22.13) v2(2.94,21.38) v2(2.87,20.65) v2(3.19,14.16) v2(3.17,13.37) v2(3.23,9.41) v2(3.25,10.86) v2(3.26,0.42) v2(3.51,8.07) v2(4.04,24.21) v2(4.25,0.42) v2(4.6,27.78) v2(4.73,6.52) v2(4.83,9.32) v2(5.27,7.06) v2(5.57,19.74) v2(5.86,7.65) v2(5.94,0.43) v2(6.32,2.42) v2(6.42,19.78) v2(6.43,0.92) v2(6.51,12.13) v2(6.73,17.2) v2(6.83,2.42) v2(6.94,19.56) v2(6.9,0.43) v2(7,23.24) v2(6.99,22.71) v2(7.02,11.62) v2(7.07,11.1) v2(7.24,19.07) v2(7.37,16.8) v2(7.41,2.42) v2(7.39,0.92) v2(7.66,5.09) v2(7.67,4.03) v2(7.82,0.43) v2(8.22,2.42) v2(8.31,0.91) v2(8.72,21.76) v2(8.86,0.42) v2(8.96,23.79) v2(9.22,7.47) v2(9.35,0.9) v2(9.36,21.09) v2(9.59,24.42) v2(9.7,17.79) v2(9.92,30.37) v2(9.92,20.5) v2(9.86,0.43) v2(10.24,25.06) v2(10.59,16.83) v2(10.68,25.72) v2(11.81,26.46) v2(11.83,0.43) v2(12,17.65) v2(11.99,17.11) v2(12.16,25.7) v2(12.4,0.42) v2(12.49,16.84) v2(12.53,6.86) v2(12.73,2.36) v2(12.9,5.08) v2(13.1,4.58) v2(13.14,3.43) v2(13.19,22.42) v2(13.42,0.4) v2(13.64,26.96) v2(13.71,24.24) v2(13.85,20.52) v2(14.01,27.23) v2(14.25,23.77) v2(14.16,2.03) v2(14.68,14.17) v2(14.67,5.04) v2(14.78,21.87) v2(14.78,0.41) v2(15.06,25.89) v2(15.64,25.19) v2(15.87,23.88) v2(16.57,0.4) v2(16.82,18.6) v2(16.82,18.17) v2(16.81,17.66) v2(16.81,17.14) v2(17.04,28.77) v2(17.16,3.46) v2(17.19,2.84) v2(17.18,2.06) v2(17.8,3.47) v2(17.78,2.62) v2(18.32,3.18) v2(18.43,24.38) v2(18.62,25.66) v2(18.72,26.46) v2(18.7,1.43) v2(18.97,8.15) v2(19.09,18.61) v2(19.06,0.4) v2(19.27,2.04) v2(19.44,26.02) v2(19.5,27.15) v2(19.71,2.45) v2(19.84,8.15) v2(19.87,23.74) v2(19.92,0.89) v2(19.9,0.42) v2(20,4.67) v2(20.06,18.79) v2(20.29,1.51) v2(20.55,0.98) v2(20.53,0.43) v2(21.06,1.87) v2(21.14,1.11) v2(21.19,2.38) v2(21.28,4) v2(21.53,6) v2(21.51,4.57) v2(21.59,25.95) v2(21.63,0.41) v2(22.1,25.29) v2(22.32,29.87) v2(22.34,29.26) v2(22.48,5.12) v2(22.61,24.82) v2(22.62,0.41) v2(22.77,4.1) v2(22.87,29.89) v2(22.87,25.24) v2(23.33,24.81) v2(23.43,30.89) v2(23.43,29.36) v2(23.68,30.3) v2(23.69,25.39) v2(23.74,0.41) v2(23.79,24.38) v2(23.85,12.34) v2(23.84,10.61) v2(23.84,9.76) v2(23.85,9.22) v2(23.85,8.35) v2(23.83,7.37) v2(23.81,6.62) v2(23.84,6.05) v2(23.95,24.89) v2(23.93,23.77) v2(23.85,11.44) v2(23.99,43.07) v2(23.95,29.76) v2(24.03,22.9) v2(23.99,19.52) v2(24.05,20.71) v2(24.13,3.76) v2(24.2,29.17) v2(24.18,21.85) v2(24.28,31.12) v2(24.32,24.47) v2(24.43,5.32) v2(24.55,30.61) v2(24.53,28.88) v2(24.5,23.35) v2(24.55,0.8) v2(24.57,42.56) v2(24.59,41.61) v2(24.59,40.61) v2(24.59,39.61) v2(24.59,38.61) v2(24.59,37.61) v2(24.59,36.61) v2(24.59,35.61) v2(24.59,34.61) v2(24.59,33.61) v2(24.58,32.59) v2(24.58,31.54) v2(24.56,29.85) v2(24.59,28.33) v2(24.59,26.69) v2(24.59,25.82) v2(24.59,24.94) v2(24.58,22.37) v2(24.59,20.15) v2(24.59,19.49) v2(24.59,12.43) v2(24.59,11.49) v2(24.58,10.58) v2(24.59,9.52) v2(24.59,8.5) v2(24.59,7.4) v2(24.59,6.12) v2(24.55,4.9) v2(24.58,4.45) v2(24.58,3.79) v2(24.59,3.18) v2(24.59,1.26) v4(7.48,23.99) v4(7.48,23.35) v4(7.8,24.31) v4(7.8,23.67) v4(7.8,23.03) v4(8.12,23.99) v4(8.12,23.35) v4(8.12,22.72) v4(8.44,24.94) v4(8.44,23.67) v4(8.44,23.03) v4(8.44,22.4) v4(8.75,24.62) v4(8.75,23.35) v4(8.75,22.72) v4(8.75,22.08) v4(9.07,25.58) v4(9.07,24.31) v4(9.07,22.4) v4(9.07,21.76) v4(9.39,25.26) v4(9.39,23.99) v4(9.39,22.08) v4(9.39,21.44) v4(9.71,26.22) v4(9.71,24.94) v4(9.71,22.4) v4(9.71,21.12) v4(10.03,25.9) v4(10.03,24.62) v4(10.03,21.44) v4(10.03,20.81) v4(10.35,26.85) v4(10.35,25.58) v4(10.35,23.03) v4(10.35,21.12) v4(10.66,27.17) v4(10.66,26.53) v4(10.66,25.26) v4(10.66,21.44) v4(10.98,27.49) v4(10.98,26.85) v4(10.98,26.22) v4(10.98,23.67) v4(10.98,21.76) v4(11.3,27.17) v4(11.3,26.53) v4(11.3,25.9) v4(11.3,22.08) v4(11.3,21.44) v4(11.62,26.85) v4(11.62,24.31) v4(11.62,22.4) v4(11.62,21.76) v4(11.62,19.22) v4(11.94,28.44) v4(11.94,27.17) v4(11.94,22.08) v4(12.25,28.76) v4(12.25,28.13) v4(12.25,27.49) v4(12.25,26.22) v4(12.25,24.94) v4(12.25,19.85) v4(12.57,29.08) v4(12.57,28.44) v4(12.57,27.81) v4(12.57,23.35) v4(12.57,20.17) v4(12.89,28.76) v4(12.89,28.13) v4(12.89,25.58) v4(12.89,23.67) v4(12.89,20.49) v4(12.89,19.22) v4(12.89,18.58) v4(13.21,28.44) v4(13.21,27.17) v4(13.21,23.35) v4(13.21,22.08) v4(13.21,20.17) v4(13.21,18.9) v4(13.53,28.76) v4(13.53,28.13) v4(13.53,27.49) v4(13.53,24.94) v4(13.53,22.4) v4(13.53,20.49) v4(13.53,19.85) v4(13.85,28.44) v4(13.85,27.81) v4(13.85,26.53) v4(13.85,22.08) v4(13.85,20.17) v4(14.16,28.13) v4(14.16,26.85) v4(14.16,24.31) v4(14.16,20.49) v4(14.48,27.81) v4(14.48,27.17) v4(14.48,25.9) v4(14.48,23.35) v4(14.48,20.81) v4(14.8,27.49) v4(14.8,26.22) v4(14.8,23.67) v4(14.8,23.03) v4(15.12,26.53) v4(15.12,25.26) v4(15.12,22.08) v4(15.44,26.85) v4(15.44,25.58) v4(15.44,23.67) v4(15.44,22.4) v4(15.44,21.76) v4(15.75,25.9) v4(15.75,24.62) v4(15.75,22.08) v4(15.75,21.44) v4(16.07,26.22) v4(16.07,24.94) v4(16.39,25.26) v4(16.39,24.62) v4(16.39,22.72) v4(16.71,25.58) v4(16.71,24.94) v4(16.71,24.31) v4(16.71,23.67) v4(16.71,22.4) v4(17.03,25.26) v4(17.03,24.62) v4(17.03,23.99) v4(17.03,23.35) v4(17.35,24.94) v4(17.35,24.31) v4(17.35,23.67) v4(17.35,23.03) v4(17.66,24.62) v4(17.66,23.99) v4(17.66,23.35) v4(17.66,22.72) v4(17.98,24.31) v4(17.98,23.67) v4(17.98,23.03) v4(18.3,23.99) v4(18.3,23.35) v5(1.06,14.72) v5(1.07,13.34) v5(1.23,14.37) v5(1.54,13.8) v5(1.53,13.32) v5(1.81,6.37) v5(2.34,13.44) v5(2.39,43.12) v5(2.39,42.67) v5(2.39,42.17) v5(2.37,41.69) v5(2.37,41.25) v5(2.39,40.8) v5(2.39,40.3) v5(2.39,39.82) v5(2.39,39.35) v5(2.39,38.9) v5(2.39,38.4) v5(2.39,37.92) v5(2.39,37.39) v5(2.39,36.94) v5(2.39,36.44) v5(2.39,35.96) v5(2.39,35.51) v5(2.39,35.06) v5(2.39,34.56) v5(2.39,34.09) v5(2.39,33.61) v5(2.39,33.16) v5(2.39,32.66) v5(2.39,32.19) v5(2.41,31.66) v5(2.38,14.12) v5(2.54,31.28) v5(2.74,42.9) v5(2.74,42.45) v5(2.74,41.95) v5(2.74,41.47) v5(2.74,41) v5(2.74,40.55) v5(2.74,40.05) v5(2.74,39.57) v5(2.74,39.1) v5(2.74,38.65) v5(2.74,38.15) v5(2.74,37.67) v5(2.74,37.16) v5(2.74,36.71) v5(2.74,36.21) v5(2.74,35.74) v5(2.74,35.26) v5(2.74,34.81) v5(2.74,34.31) v5(2.74,33.84) v5(2.74,33.36) v5(2.74,32.91) v5(2.74,32.41) v5(2.74,31.91) v5(2.85,31.59) v5(2.79,7.31) v5(3.02,31.24) v5(3.14,7.3) v5(3.27,31.59) v5(3.34,6.34) v5(3.45,2.39) v5(3.52,31.24) v5(3.68,13.22) v5(3.77,31.59) v5(3.77,3.34) v5(3.83,1.85) v5(3.94,13.69) v5(3.97,31.24) v5(4.22,31.59) v5(4.16,3.35) v5(4.17,2.36) v5(4.32,31.26) v5(4.3,30.92) v5(4.4,14.06) v5(4.4,7.14) v5(4.61,13.62) v5(4.58,8.73) v5(4.67,31.59) v5(4.67,31.26) v5(4.73,30.16) v5(4.85,30.51) v5(5.13,30.2) v5(5.08,29.82) v5(5.1,13.28) v5(5.27,8.05) v5(5.37,29.54) v5(5.41,13.97) v5(5.38,2.88) v5(5.47,29.88) v5(5.63,29.26) v5(5.72,31.59) v5(5.72,31.01) v5(5.77,29.59) v5(5.83,29.02) v5(5.84,26.64) v5(5.84,12.43) v5(5.8,10.52) v5(5.85,28.68) v5(5.85,28.18) v5(5.85,27.68) v5(5.85,27.18) v5(5.92,26.14) v5(5.97,31.31) v5(5.98,30.75) v5(6.03,2.23) v5(6.06,29.29) v5(6.1,25.64) v5(6.13,14.05) v5(6.05,3.49) v5(6.17,31.59) v5(6.19,31.02) v5(6.15,28.93) v5(6.15,28.43) v5(6.15,27.93) v5(6.15,27.43) v5(6.15,26.92) v5(6.21,26.42) v5(6.27,30.44) v5(6.32,25.98) v5(6.37,31.31) v5(6.38,30.75) v5(6.37,25.29) v5(6.41,13.42) v5(6.41,12.76) v5(6.38,11.75) v5(6.51,25.63) v5(6.65,31.59) v5(6.61,30.13) v5(6.64,4.41) v5(6.65,31.08) v5(6.7,30.73) v5(6.67,24.94) v5(6.82,30.41) v5(6.77,25.3) v5(6.82,13.94) v5(6.85,29.78) v5(6.88,3.13) v5(7.03,30.1) v5(7.02,25.02) v5(6.96,24.65) v5(6.98,12.91) v5(7.05,29.42) v5(7.13,28.93) v5(7.13,28.43) v5(7.13,27.93) v5(7.13,27.43) v5(7.13,26.93) v5(7.13,10.26) v5(7.17,29.81) v5(7.21,26.45) v5(7.23,24.38) v5(7.17,15.61) v5(7.2,1.81) v5(7.31,24.77) v5(7.26,16.46) v5(7.39,26.06) v5(7.42,14.72) v5(7.37,13.85) v5(7.6,31.59) v5(7.6,31) v5(7.65,25.73) v5(7.58,24.51) v5(7.58,18.32) v5(7.72,2.77) v5(7.77,16.53) v5(7.92,31.29) v5(7.92,30.89) v5(7.87,30.54) v5(7.94,25.44) v5(7.86,15.25) v5(7.86,14.49) v5(8.12,31.59) v5(8.11,30.1) v5(8.11,29.64) v5(8.11,29.14) v5(8.11,28.64) v5(8.11,28.14) v5(8.11,27.64) v5(8.11,27.14) v5(8.07,15.9) v5(8.2,30.62) v5(8.15,26.72) v5(8.22,25.15) v5(8.33,30.97) v5(8.31,26.36) v5(8.32,4.97) v5(8.37,31.31) v5(8.37,30.34) v5(8.43,24.3) v5(8.62,31.59) v5(8.63,31.11) v5(8.58,30.76) v5(8.57,26.08) v5(8.61,3.48) v5(8.79,2) v5(8.86,25.79) v5(9.12,29.51) v5(9.15,28.99) v5(9.1,28) v5(9.09,27.5) v5(9.11,27.02) v5(9.08,24.95) v5(9.17,28.54) v5(9.24,26.71) v5(9.3,30.01) v5(9.52,30.46) v5(9.5,29.61) v5(9.52,29.14) v5(9.5,26.42) v5(9.57,31.59) v5(9.57,31.01) v5(9.67,30.11) v5(9.74,16.09) v5(9.82,30.71) v5(9.76,25.6) v5(9.77,19.29) v5(9.87,31.31) v5(9.95,29.91) v5(9.9,29.56) v5(9.87,2.61) v5(9.89,2.17) v5(10.05,31.59) v5(10.02,1.68) v5(10.1,28.22) v5(10.06,27.73) v5(10.06,27.23) v5(10.22,31.29) v5(10.2,30.71) v5(10.27,30.28) v5(10.3,29.96) v5(10.4,28.66) v5(10.42,27.96) v5(10.4,27.46) v5(10.38,26.25) v5(10.55,31.59) v5(10.55,30.99) v5(10.55,30.44) v5(10.55,28.26) v5(10.48,2.74) v5(10.66,1.69) v5(10.8,29.01) v5(10.83,28.6) v5(10.9,2.21) v5(11.17,29.41) v5(11.25,29.01) v5(11.22,11.78) v5(11.18,2.74) v5(11.26,12.91) v5(11.25,1.74) v5(11.42,29.86) v5(11.52,31.59) v5(11.53,31.08) v5(11.55,30.66) v5(11.55,30.31) v5(11.56,29.48) v5(11.82,31.29) v5(11.83,29.98) v5(11.79,9.08) v5(11.87,31.59) v5(11.92,30.91) v5(11.92,30.46) v5(11.92,15.62) v5(11.97,9.72) v5(12.2,31.59) v5(12.23,31.26) v5(12.35,30.77) v5(12.45,9.71) v5(12.53,31.59) v5(12.55,31.09) v5(12.75,30.64) v5(12.67,30.26) v5(12.72,10.71) v5(12.86,11.78) v5(13.02,29.88) v5(12.97,1.38) v5(13.09,30.27) v5(13.21,29.08) v5(13.22,13.49) v5(13.44,29.92) v5(13.37,29.52) v5(13.37,6.67) v5(13.49,31.57) v5(13.48,11.38) v5(13.64,31.1) v5(13.66,13.05) v5(13.79,31.42) v5(13.79,29.56) v5(13.75,29.16) v5(13.98,31.12) v5(14,30.74) v5(14.07,31.59) v5(14.15,29.21) v5(14.09,28.79) v5(14.24,7.54) v5(14.24,6.64) v5(14.24,5.71) v5(14.3,31.24) v5(14.39,30.78) v5(14.35,30.39) v5(14.44,28.43) v5(14.55,31.59) v5(14.5,28.86) v5(14.75,31.24) v5(14.74,30.42) v5(14.7,30.04) v5(14.81,28.07) v5(14.85,28.5) v5(15,31.59) v5(15.09,30.07) v5(15.06,29.68) v5(15.21,28.15) v5(15.18,27.74) v5(15.27,31.23) v5(15.45,29.72) v5(15.41,29.33) v5(15.44,27.41) v5(15.42,26.21) v5(15.5,31.59) v5(15.56,27.79) v5(15.72,31.24) v5(15.68,27.15) v5(15.8,29.36) v5(15.76,28.97) v5(15.85,27.4) v5(15.97,31.59) v5(16.12,28.62) v5(16.06,25.57) v5(16.07,4.4) v5(16.2,31.29) v5(16.15,29.01) v5(16.33,26.48) v5(16.42,31.59) v5(16.44,14.28) v5(16.51,28.66) v5(16.47,28.27) v5(16.7,31.29) v5(16.68,26.82) v5(16.68,11.38) v5(16.75,27.83) v5(16.84,27.47) v5(16.92,31.59) v5(16.91,28.2) v5(17.04,27.71) v5(17.04,27.21) v5(17.02,25.81) v5(17.2,31.29) v5(17.32,27.59) v5(17.26,25.5) v5(17.4,31.59) v5(17.4,31.01) v5(17.41,30.58) v5(17.41,29.58) v5(17.41,29.08) v5(17.41,28.58) v5(17.39,28.08) v5(17.37,26.19) v5(17.5,25.76) v5(17.6,31.26) v5(17.75,31.59) v5(17.7,28.34) v5(17.72,27.91) v5(17.75,26.59) v5(17.77,30.81) v5(17.78,30.35) v5(17.78,29.85) v5(17.78,29.35) v5(17.78,28.85) v5(17.85,26.14) v5(17.97,31.24) v5(18.05,28.66) v5(18.1,31.59) v5(18.07,28.27) v5(18.1,26.96) v5(18.2,26.51) v5(18.35,29.04) v5(18.37,31.24) v5(18.42,28.62) v5(18.51,27.32) v5(18.55,26.86) v5(18.6,31.59) v5(18.72,29.41) v5(18.82,31.24) v5(18.78,28.97) v5(18.86,27.67) v5(18.95,27.24) v5(19.05,31.59) v5(19,25.24) v5(19.12,29.74) v5(19.14,29.32) v5(19.07,7.35) v5(19.21,28.03) v5(19.32,31.24) v5(19.32,27.61) v5(19.44,30.07) v5(19.55,31.59) v5(19.51,29.65) v5(19.57,28.38) v5(19.65,27.94) v5(19.73,30.4) v5(19.67,25.24) v5(19.8,31.24) v5(19.94,30.76) v5(19.85,29.99) v5(19.94,28.71) v5(20.02,31.59) v5(20.02,28.26) v5(20.08,31.08) v5(20.11,30.37) v5(20.28,30.77) v5(20.25,29.03) v5(20.37,31.59) v5(20.35,31.26) v5(20.38,28.61) v5(20.54,29.35) v5(20.51,8.42) v5(20.72,28.98) v5(20.69,7.33) v5(20.8,10.94) v5(20.85,29.73) v5(20.95,29.36) v5(21.1,30.17) v5(21.2,10.51) v5(21.33,31.58) v5(21.33,31.14) v5(21.26,30.64) v5(21.28,29.81) v5(21.28,21.41) v5(21.31,20.83) v5(21.41,8.42) v5(21.49,30.31) v5(21.5,20.15) v5(21.63,31.31) v5(21.62,30.84) v5(21.92,31.59) v5(22.15,31.24) v5(22.4,31.59) v5(22.6,31.24) v5(22.56,14.04) v5(22.83,31.58) v5(22.75,11.7) v5(22.77,10.61) v5(22.8,6.96) v5(23.1,31.24) v5(23.13,12.77) v5(23.21,31.59) v5(23.26,43.14) v5(23.26,42.7) v5(23.26,42.2) v5(23.26,41.75) v5(23.26,41.28) v5(23.26,40.8) v5(23.26,40.3) v5(23.26,39.85) v5(23.26,39.38) v5(23.26,38.9) v5(23.26,38.4) v5(23.26,37.95) v5(23.26,37.44) v5(23.26,36.97) v5(23.26,36.47) v5(23.26,36.02) v5(23.26,35.54) v5(23.26,35.07) v5(23.26,34.57) v5(23.26,34.12) v5(23.26,33.64) v5(23.26,33.17) v5(23.26,32.67) v5(23.26,32.22) v5(23.25,31.9) v5(23.38,19.48) v5(23.61,42.93) v5(23.61,42.45) v5(23.61,41.95) v5(23.61,41.5) v5(23.61,41.03) v5(23.61,40.55) v5(23.61,40.05) v5(23.61,39.6) v5(23.61,39.15) v5(23.61,38.68) v5(23.61,38.18) v5(23.61,37.73) v5(23.61,37.19) v5(23.61,36.72) v5(23.61,36.22) v5(23.61,35.77) v5(23.61,35.29) v5(23.61,34.82) v5(23.61,34.32) v5(23.63,33.87) v5(23.63,33.42) v5(23.61,32.94) v5(23.61,32.44) v5(23.61,31.99) v5(23.57,31.24) v5(23.69,31.59)
